# Altium PCB A13-OLinuXino-MICRO_Rev_B_saved.PcbDoc (part 1 of 4)
Units mil, origin at the board's own origin, x right, y up, seen from the top; angles counter-clockwise.
Board outline 3950 x 3350 mil, 4 copper layers (Top, Route2, Route15, Bottom), stack 64.567 mil thick; 262 components, 264 nets, 1099 pads, 476 vias.
Unrouted connection lines stored in the file: 19.
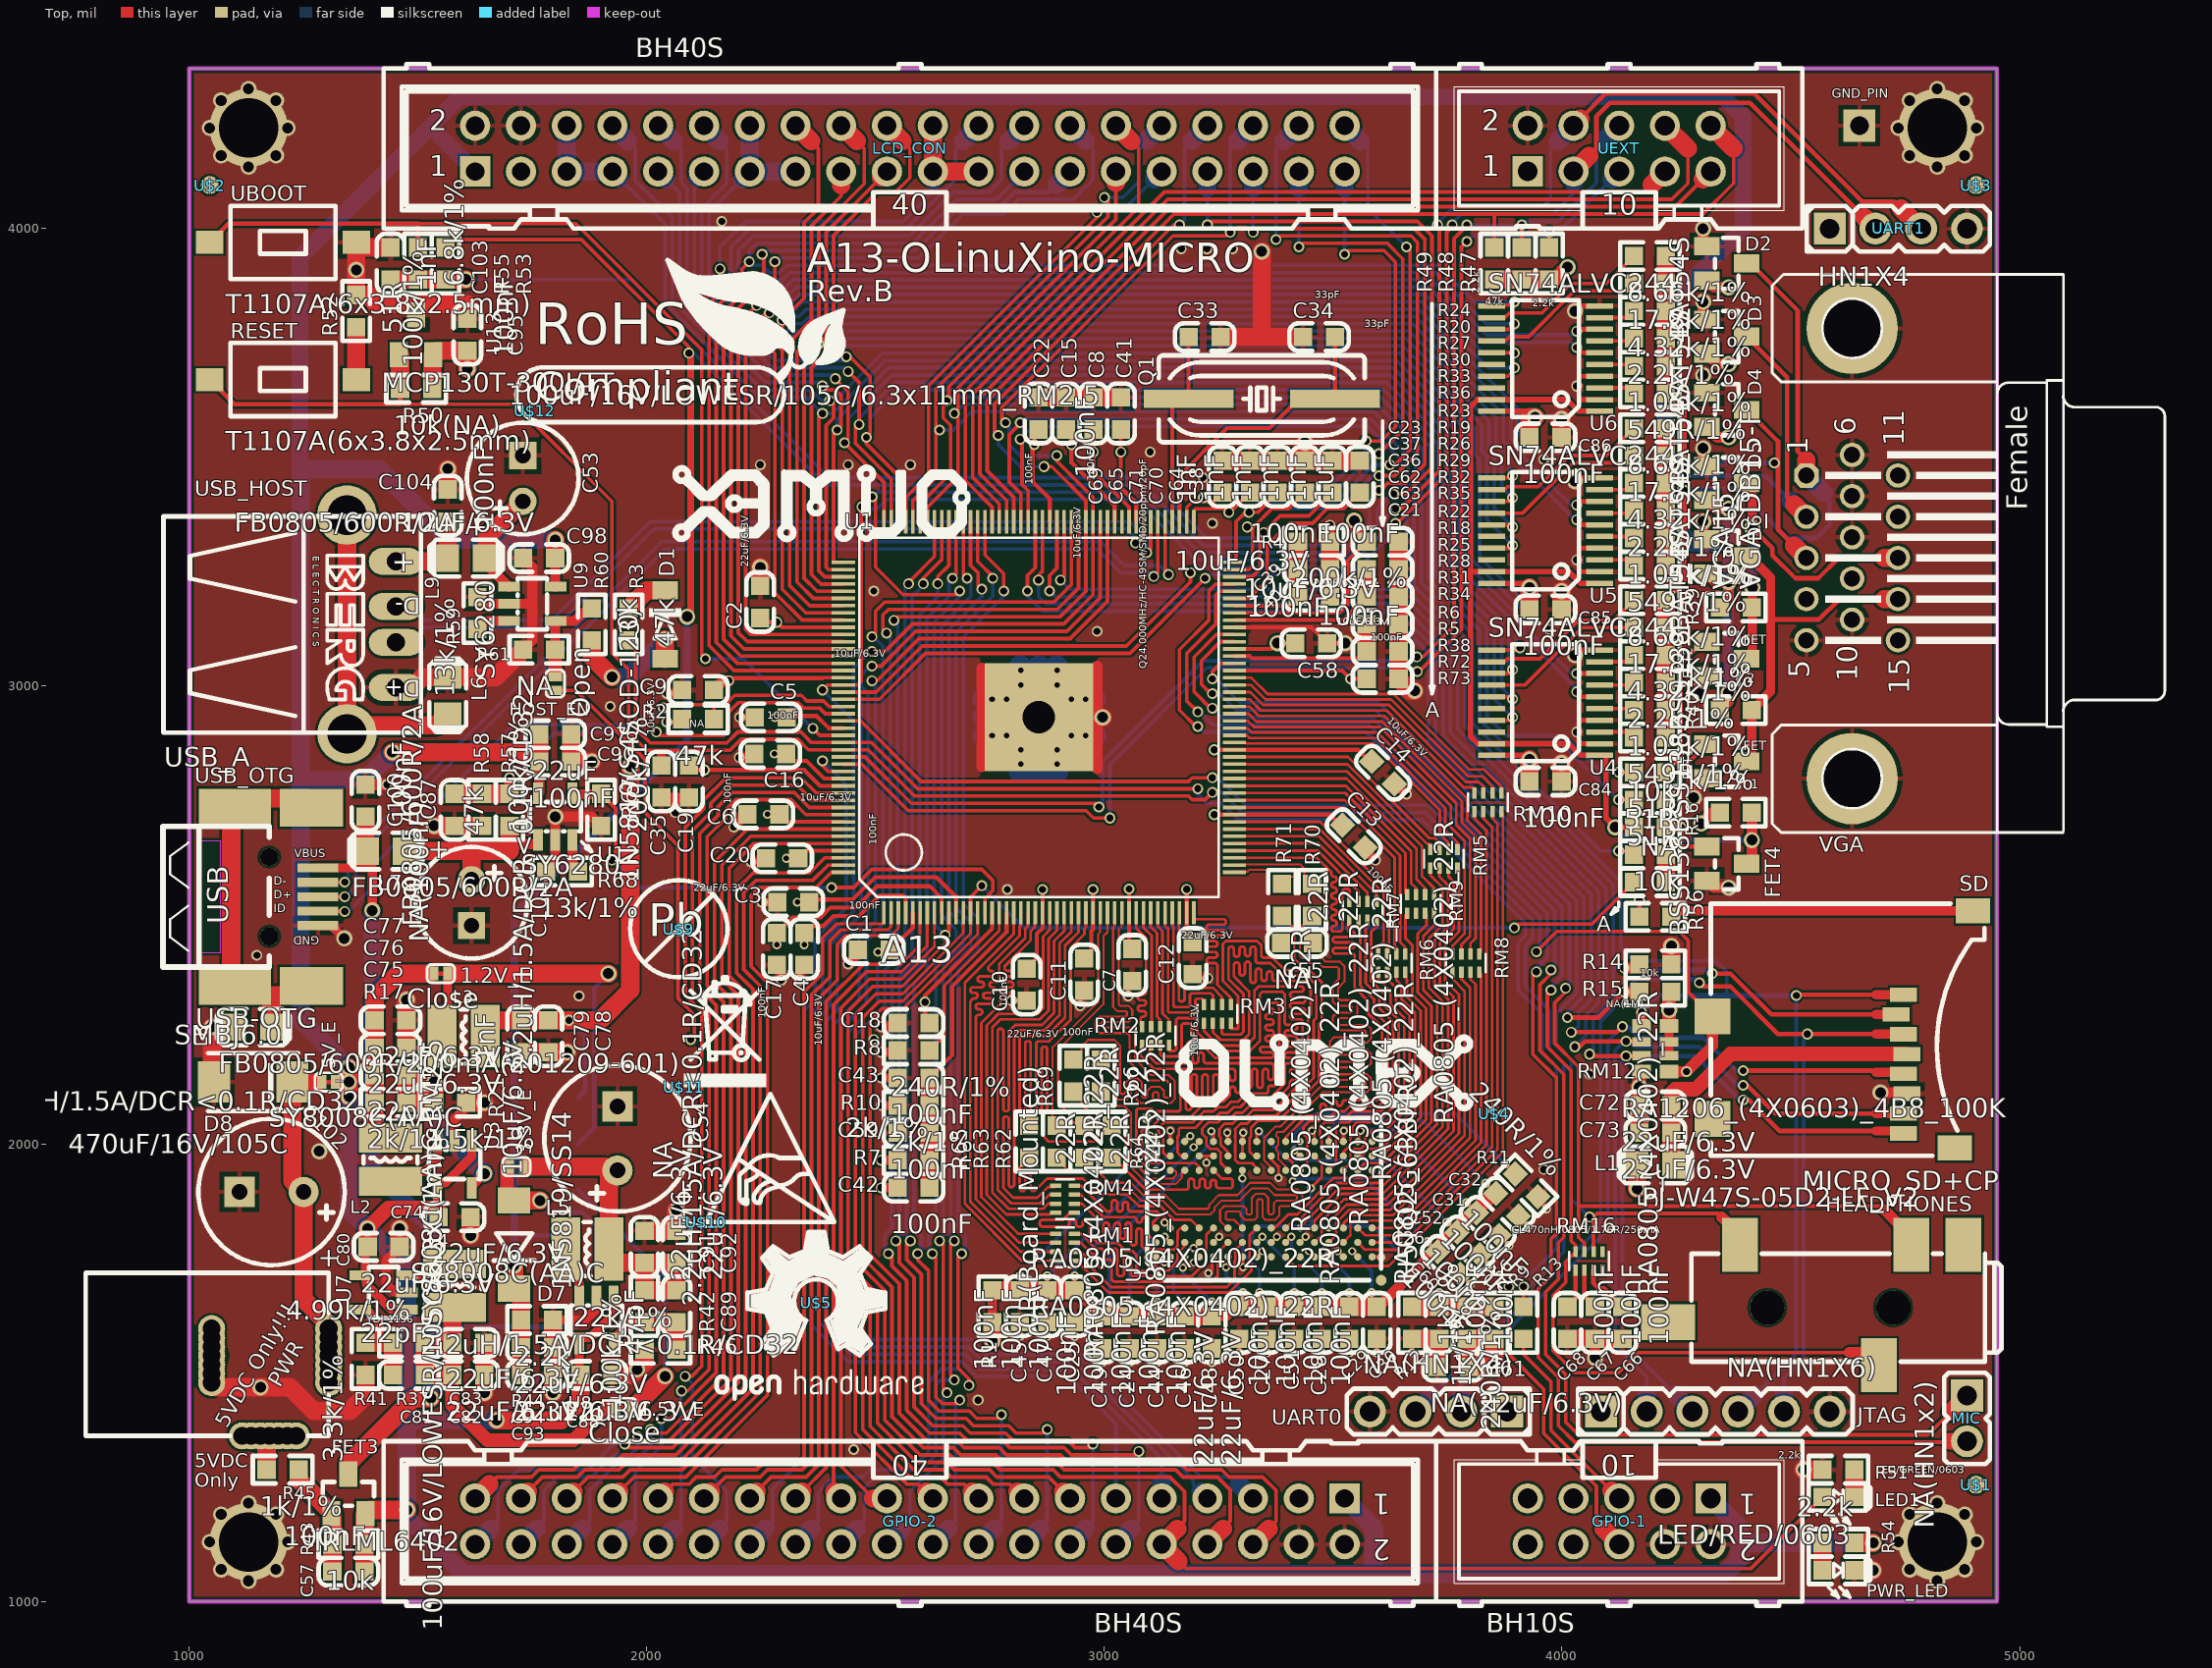
[diagram p0: Top view]
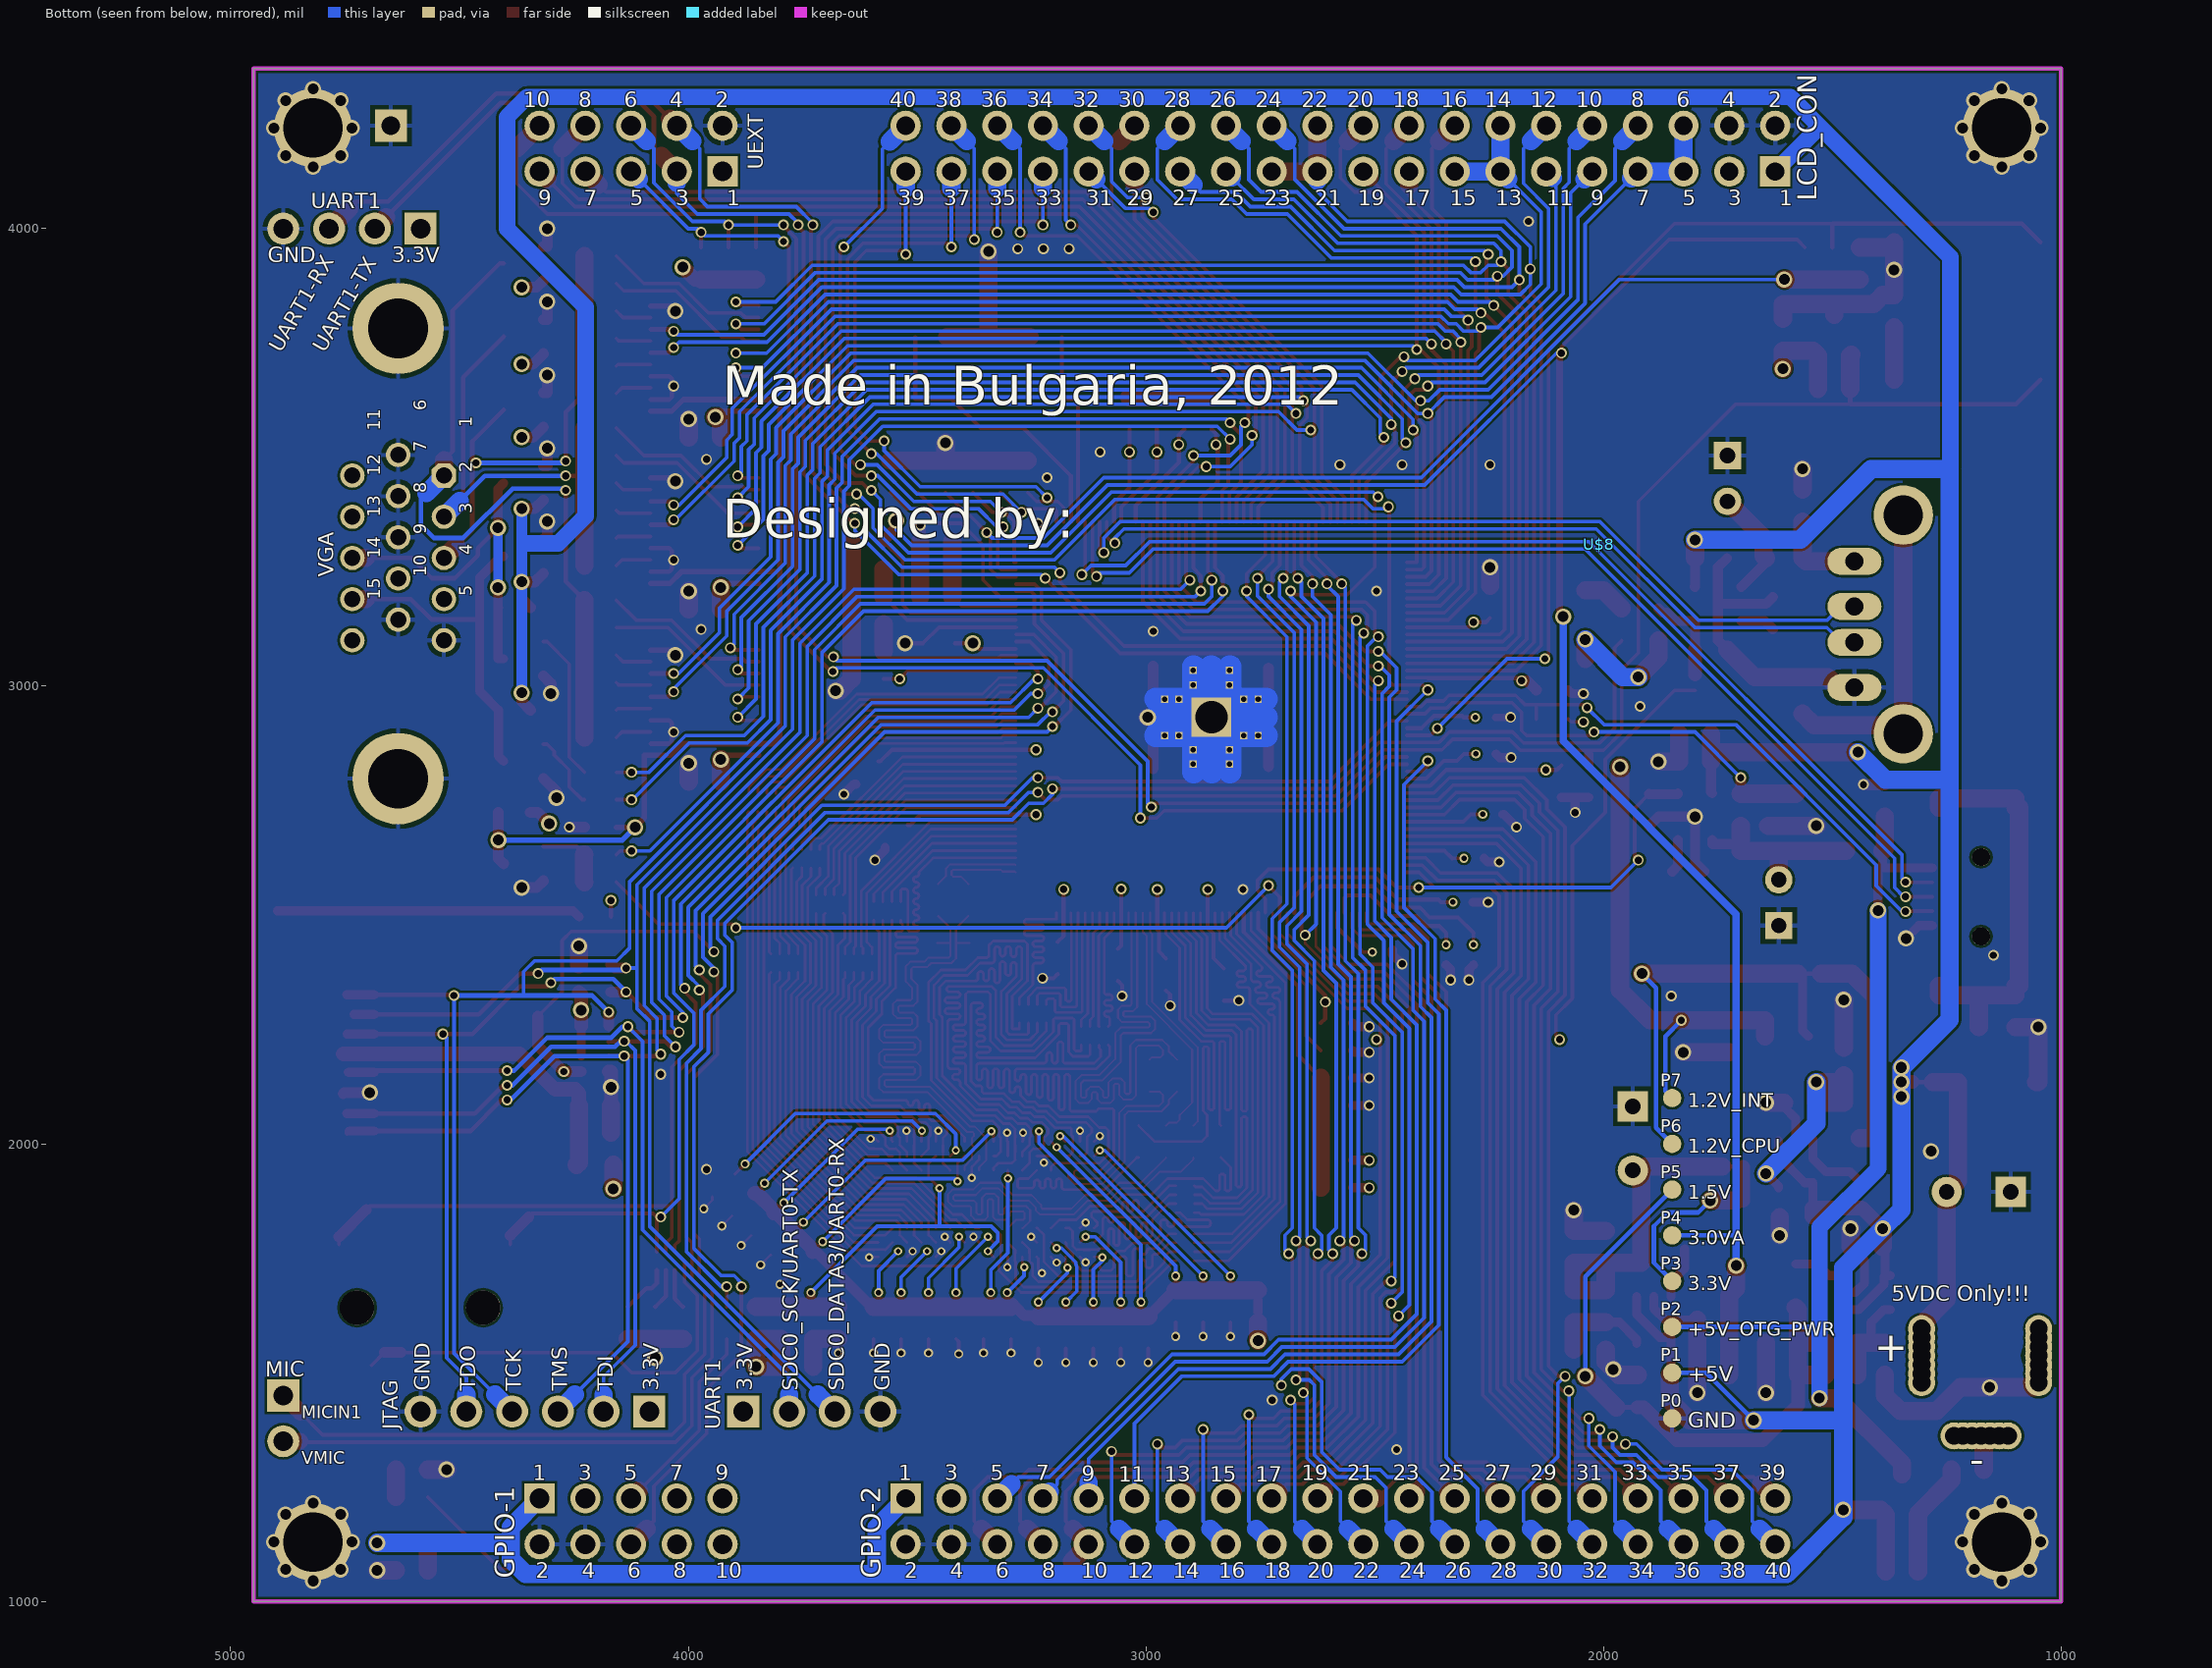
[diagram p1: Bottom view, seen from below]
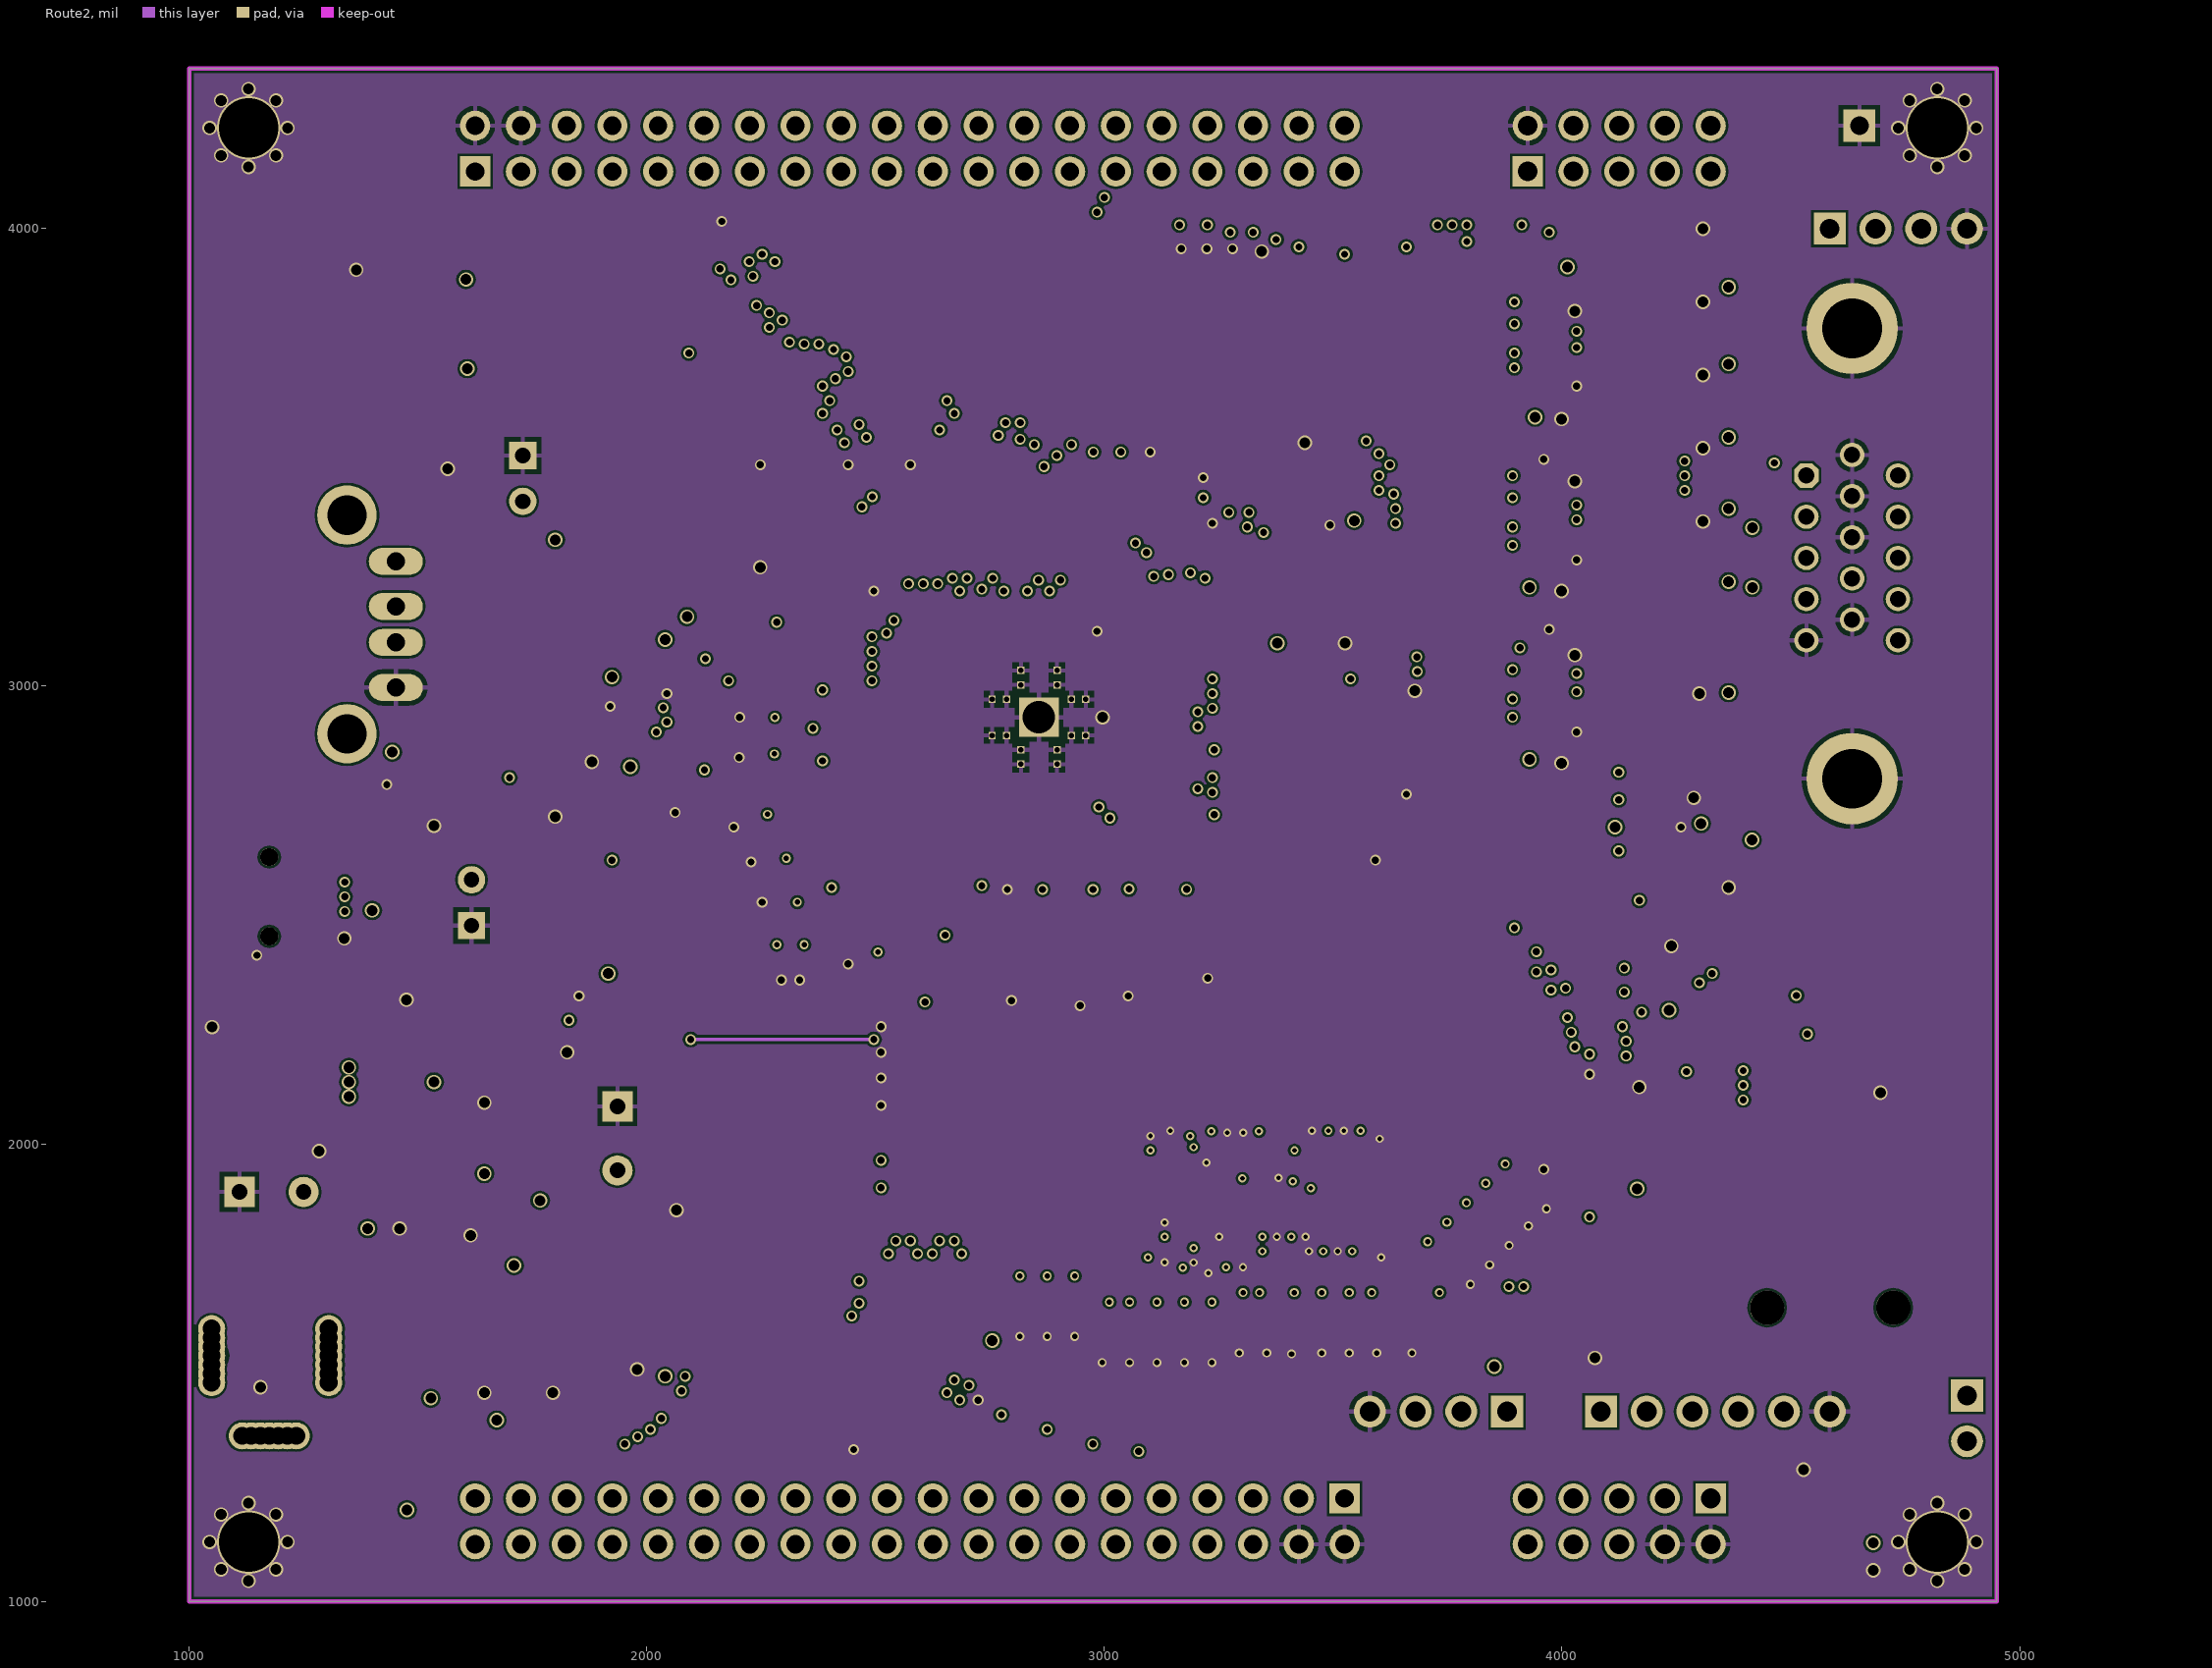
[diagram p2: Route2]
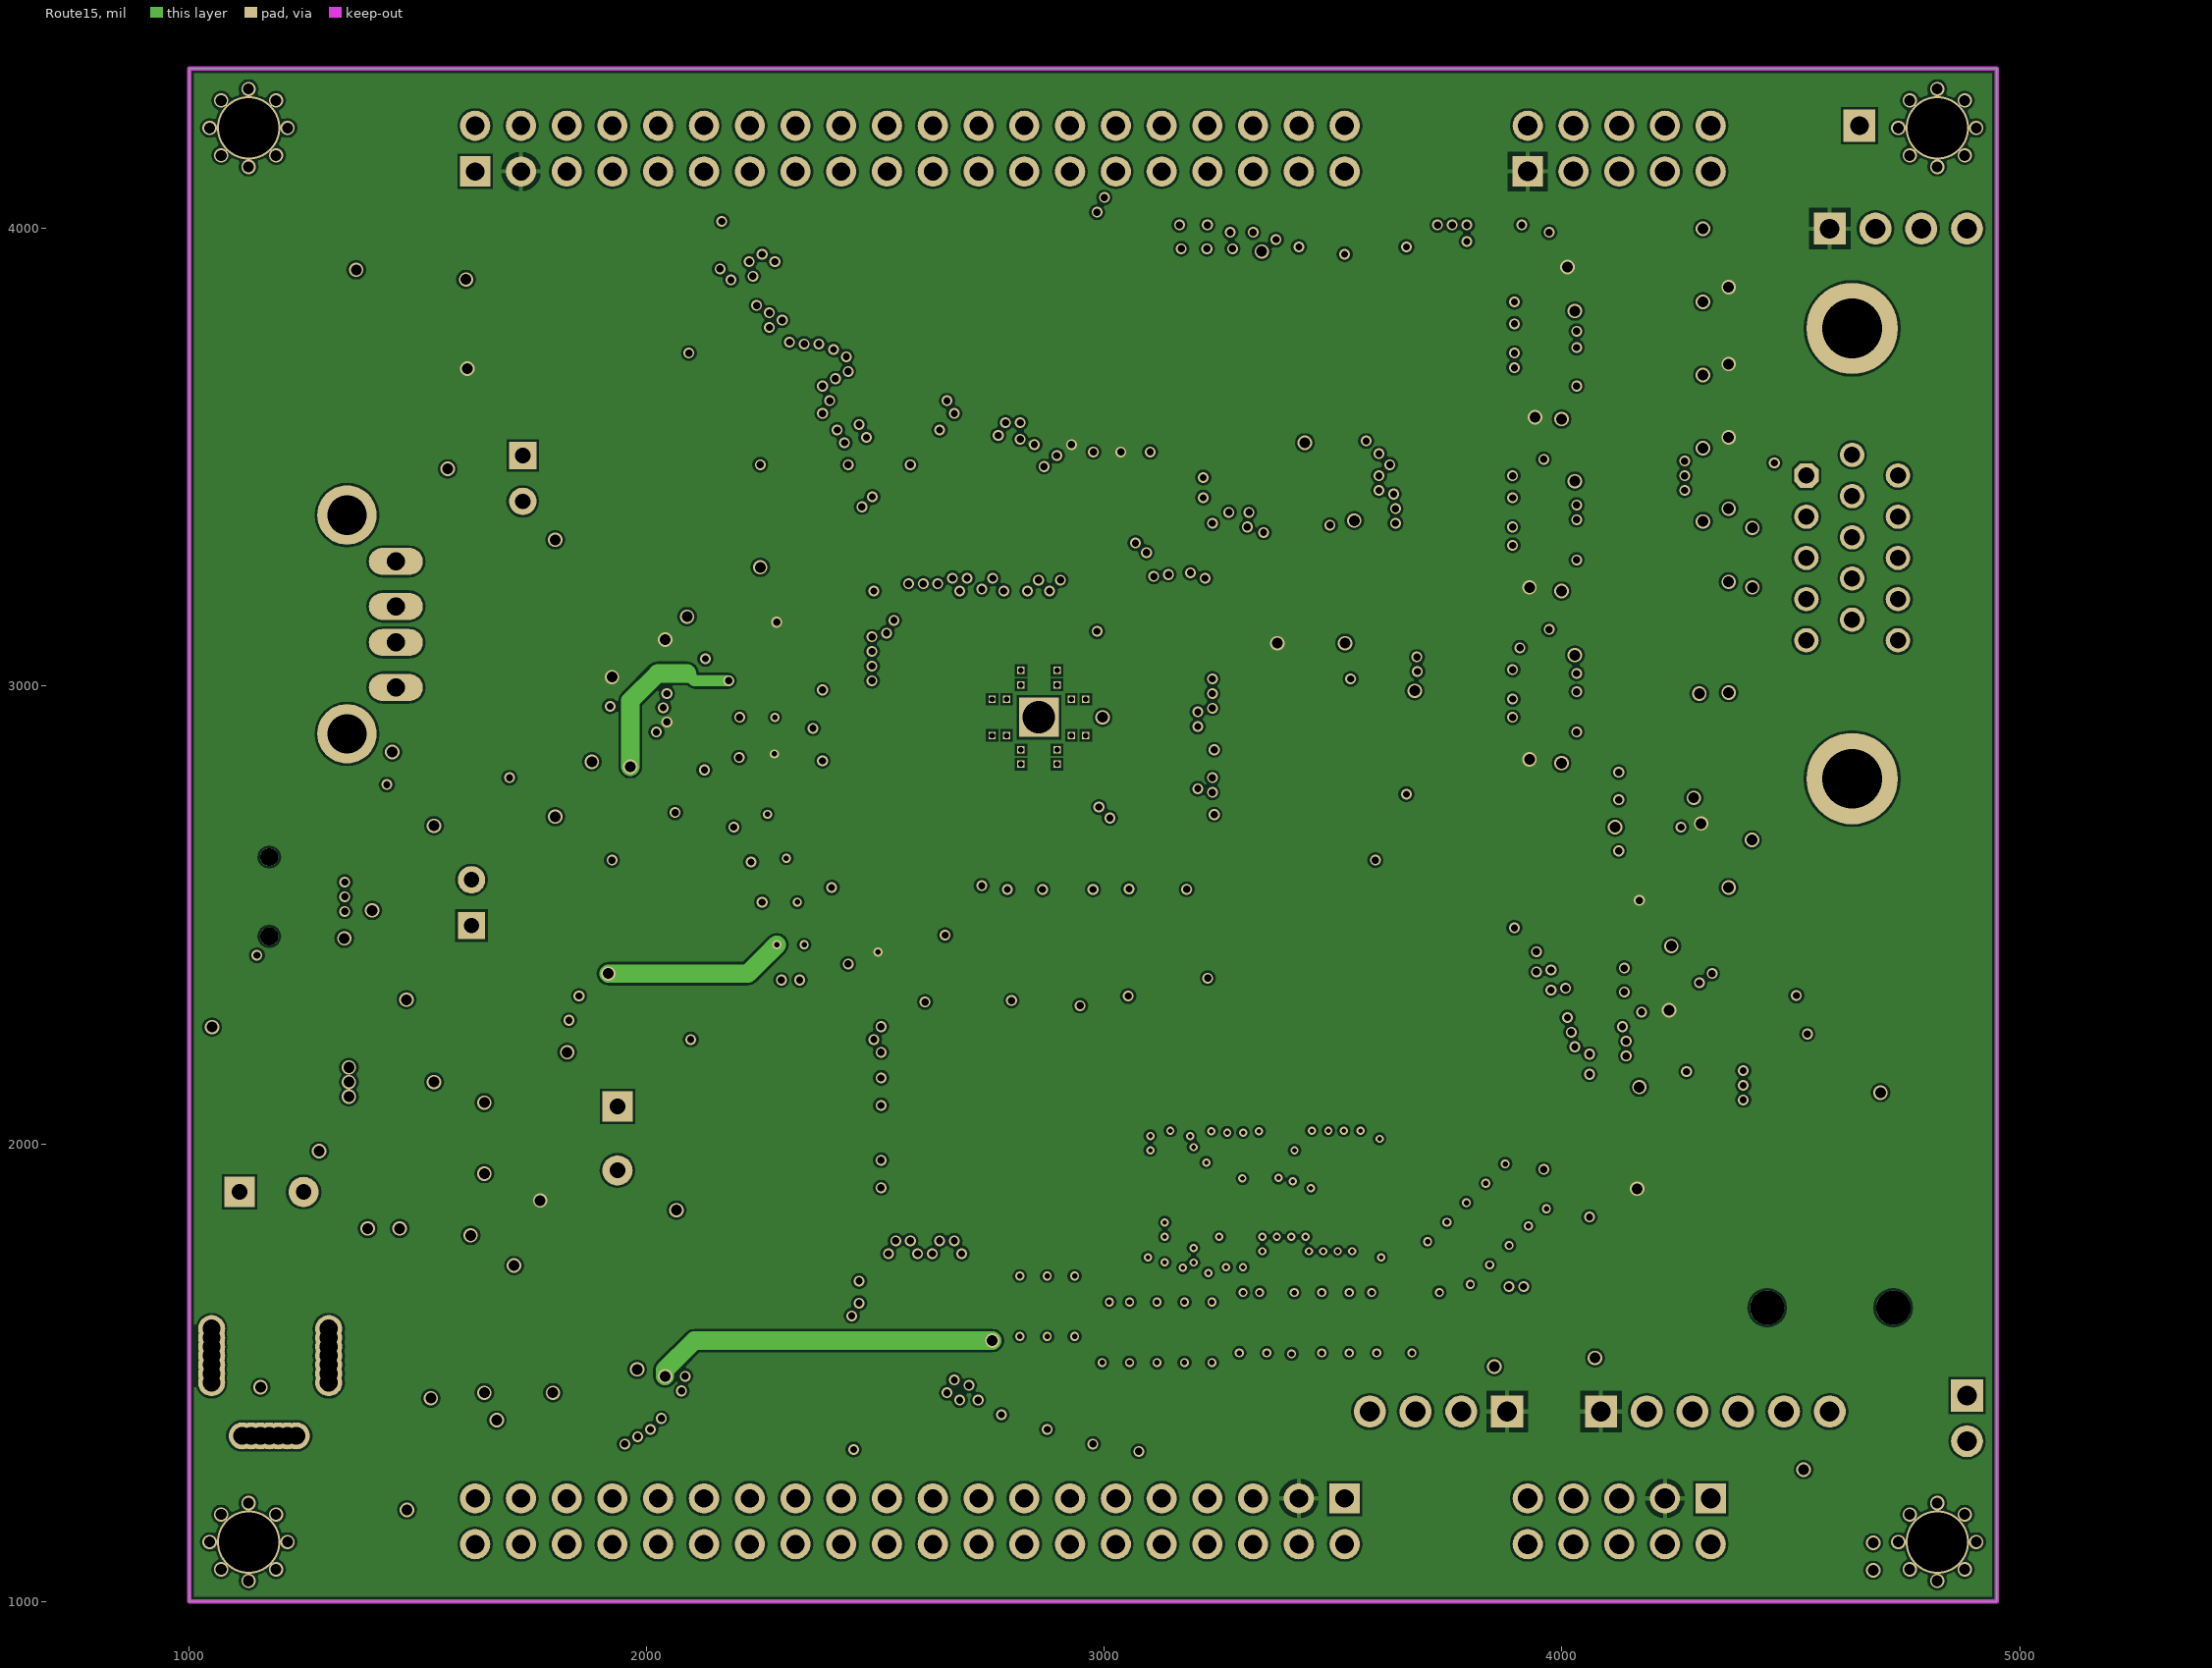
[diagram p3: Route15]

## Layer stack, top to bottom
Top Solder: solder mask 0.4, Solder Resist, Dk 3.5
Top: signal copper 1.378
Dielectric 1: core 19.685, FR-4, Dk 4.8
Route2: signal copper 1.378
Dielectric 2: core 19.685, FR-4, Dk 4.8
Route15: signal copper 1.378
Dielectric 3: core 19.685, FR-4, Dk 4.8
Bottom: signal copper 1.378
Bottom Solder: solder mask 0.4, Solder Resist, Dk 3.5

## Board outline
1000,4350 1000,1000 4950,1000 4950,4350

## Design rules (kind name [scope] priority, off if disabled: settings)
Clearance Clearance_1 [WithinRoom('vRestrict1') vs IsVia or IsThruPin] p1: gap=10
Clearance [All] p2: gap=5.2 except(0: SMDPad-SMDPad SMDPad-THPad SMDPad-Via)
Clearance "Clearance (Same Net)" [All] p3: gap=0 except(1: SMDPad-SMDPad SMDPad-THPad SMDPad-Via)
HoleSize HoleSize_1 [All] p1: absolutevalues=TRUE maxlimit=100000 minlimit=10 maxpercent=80.000 minpercent=20.000
HoleSize [All] p2: absolutevalues=TRUE maxlimit=100 minlimit=1 maxpercent=80.000 minpercent=20.000
HoleToHoleClearance mdViaViaSameLayer [All] p1: gap=8 allowstackedmicrovias=TRUE
HoleToHoleClearance [All] p2: gap=10 allowstackedmicrovias=TRUE
PasteMaskExpansion mlMinCreamFrame [All] p1: expansion=0
PasteMaskExpansion [All] p2: expansion=0
PolygonConnect ThermalVias [IsVia] p1: connectstyle=Direct reliefconductorwidth=10 reliefentries=4 polygonreliefangle="90 Angle" airgapwidth=10
PolygonConnect [All] p2: connectstyle=Relief reliefconductorwidth=10 reliefentries=4 polygonreliefangle="90 Angle" airgapwidth=10
RoomDefinition vRestrict1 [IsVia or IsThruPin vs False] p1: confinementstyle=ConfineOut formatcopy=TRUE lockcomponents=FALSE outline 1760,1715 1760,1845 1660,1845 1660,1715
RoutingVias [All] p1: holewidth=28 width=50 viastyle="Through Hole" minholewidth=28 minwidth=50 maxholewidth=28 maxwidth=50
SilkToSilkClearance [All] p1 off: silktosilkclearance=10
SilkToSolderMaskClearance [IsPad] p1 off: minsilkscreentomaskgap=10 clearancetoexposedcopper=TRUE
SolderMaskExpansion mlMinStopFrame [All] p1: expansion=2
SolderMaskExpansion [All] p2: expansion=4
Width Width_1 [All] p1: maxlimit=100000 minlimit=4.5 preferedwidth=10
Width [All] p2: maxlimit=10 minlimit=10 preferedwidth=10
25 further rules are at their usual default settings.

## Components (designator, comment, footprint, x,y, rotation, side; value= is the part's Value field where it differs from the comment)
1.2V_E "Close" SJ_1_SMALLER_CLOSE 1550,2372 r0 top
1.5V_E "Close" SJ_1_SMALLER_CLOSE 1947,1424 r0 top
3.3V_E "Close" SJ_1_SMALLER_CLOSE 1715,1950 r180 top
5V_E "Close" SJ_1_SMALLER_CLOSE 1305,2135 r0 top
C1 "100nF" C0603_DWS 2496,2424 r0 top
C2 "22uF/6.3V" C0603_DWS 2248,3184 r270 top
C3 "22uF/6.3V" C0603_DWS 2320,2528 r0 top
C4 "10uF/6.3V" C0603_DWS 2344,2426 r90 top
C5 "10uF/6.3V" C0603_DWS 2271,2932 r0 top
C6 "10uF/6.3V" C0603_DWS 2255,2720 r0 top
C7 "22uF/6.3V" C0603_DWS 3061,2391 r90 top
C8 "10uF/6.3V" C0603_DWS 2976,3596 r270 top
C9 "10uF/6.3V" C0603_DWS 2112,2992 r0 top
C10 "22uF/6.3V" C0603_DWS 2830,2348 r90 top
C11 "100nF" C0603_DWS 2956,2370 r90 top
C12 "10uF/6.3V" C0603_DWS 3193,2406 r90 top
C13 "100nF" C0603_DWS 3545,2672 r135 top
C14 "10uF/6.3V" C0603_DWS 3609,2811 r135 top
C15 "100nF" C0603_DWS 2916,3596 r270 top
C16 "100nF" C0603_DWS 2270,2852 r0 top
C17 "100nF" C0603_DWS 2284,2426 r90 top
C18 "100nF" C0603_DWS 2583,2264 r0 top
C19 "100nF" C0603_DWS 2092,2792 r90 top
C20 "100nF" C0603_DWS 2296,2624 r0 top
C21 "100nF" C0603_DWS 3608,3016 r180 top
C22 "100nF" C0603_DWS 2856,3596 r270 top
C23 "22uF/6.3V" C0603_DWS 3608,3316 r180 top
C24 "100nF" C0603_DWS 3055,1588 r270 top
C25 "100nF" C0603_DWS 2935,1645 r270 top
C26 "100nF" C0603_DWS 3752.87,1739.69 r315 top
C27 "22uF/6.3V" C0603_DWS 3355,1609 r270 top
C28 "100nF" C0603_DWS 3475,1609 r270 top
C29 "100nF" C0603_DWS 3535,1609 r270 top
C30 "100nF" C0603_DWS 3595,1609 r270 top
C31 "100nF" C0603_DWS 3837.72,1824.55 r315 top
C32 "100nF" C0603_DWS 3880.15,1866.97 r315 top
C33 "33pF" C0603_DWS 3219,3763 r180 top
C34 "33pF" C0603_DWS 3469,3763 r0 top
C35 "NA" C0603_DWS 2032,2792 r90 top
C36 "10uF/6.3V" C0603_DWS 3608,3196 r180 top
C37 "100nF" C0603_DWS 3608,3256 r180 top
C38 "1uF" C0603_DWS 3558,3458 r270 top
C39 "100nF" C0603_DWS 3458,3256 r180 top
C40 "10uF/6.3V" C0603_DWS 3458,3196 r180 top
C41 "100nF" C0603_DWS 3036,3596 r270 top
C42 "100nF" C0603_DWS 2583,1904 r0 top
C43 "100nF" C0603_DWS 2583,2144 r0 top
C44 "100nF" C0603_DWS 3115,1588 r270 top
C45 "100nF" C0603_DWS 2815,1645 r270 top
C46 "100nF" C0603_DWS 3175,1588 r270 top
C47 "100nF" C0603_DWS 2875,1645 r270 top
C48 "100nF" C0603_DWS 3235,1588 r270 top
C49 "100nF" C0603_DWS 2995,1588 r270 top
C50 "22uF/6.3V" C0603_DWS 3295,1609 r270 top
C51 "100nF" C0603_DWS 3415,1609 r270 top
C52 "100nF" C0603_DWS 3795.3,1782.12 r315 top
C53 "100uF/16V/LOWESR/105C/6.3x11mm_RM2.5" E2,5-6,3 1729,3454 r90 top
C54 "NA" E3,5-8 1936,2012 r90 top
C55 "NA" C0603_DWS 3421,2439 r0 top
C56 "100nF" C0603_DWS 3792,1609 r90 top
C57 "100nF" C0603_DWS 1348,1065 r180 top
C58 "100nF" C0603_DWS 3452,3094 r180 top
C59 "100nF" C0603_DWS 2583,2024 r0 top
C60 "100nF" C0603_DWS 3732,1609 r90 top
C61 "NA(22uF/6.3V)" C0603_DWS 3762,1513 r0 top
C62 "10uF/6.3V" C0603_DWS 3608,3136 r180 top
C63 "100nF" C0603_DWS 3608,3076 r180 top
C64 "1nF" C0603_DWS 3498,3458 r270 top
C65 "1nF" C0603_DWS 3318,3458 r270 top
C66 "100nF" C0603_DWS 4132,1609 r90 top
C67 "100nF" C0603_DWS 4072,1609 r90 top
C68 "100nF" C0603_DWS 4012,1609 r90 top
C69 "1nF" C0603_DWS 3258,3458 r270 top
C70 "1nF" C0603_DWS 3438,3458 r270 top
C71 "1nF" C0603_DWS 3378,3458 r270 top
C72 "22uF/6.3V" C0603_DWS 4204,2084 r0 top
C73 "22uF/6.3V" C0603_DWS 4204,2024 r0 top
C74 "22uF/6.3V" C0603_DWS 1580,1840 r0 top
C75 "22pF" C0603_DWS 1440,2150 r0 top
C76 "22uF/6.3V" C0603_DWS 1440,2210 r0 top
C77 "22uF/6.3V" C0603_DWS 1440,2270 r0 top
C78 "10uF/6.3V" C0603_DWS 1785,2235 r270 top
C79 "1nF" C0603_DWS 1725,2235 r270 top
C80 "22uF/6.3V" C0603_DWS 1425,1775 r0 top
C81 "22pF" C0603_DWS 1480,1495 r180 top
C82 "22uF/6.3V" C0603_DWS 1610,1495 r0 top
C83 "22uF/6.3V" C0603_DWS 1610,1565 r0 top
C84 "100nF" C0603_DWS 3964,2792 r0 top
C85 "100nF" C0603_DWS 3964,3168 r0 top
C86 "100nF" C0603_DWS 3964,3544 r0 top
C87 "NA(100nF)" C0603_DWS 1580,2730 r270 top
C88 "22uF/6.3V" C0603_DWS 1890,1495 r0 top
C89 "47pF" C0603_DWS 2065,1645 r270 top
C90 "100nF" C0603_DWS 1800,2835 r0 top
C91 "22uF/6.3V" C0603_DWS 1995,1775 r90 top
C92 "22uF/6.3V" C0603_DWS 2065,1775 r90 top
C93 "22uF/6.3V" C0603_DWS 1760,1495 r0 top
C94 "22uF/6.3V" C0603_DWS 1760,1555 r0 top
C95 "100nF" C0603_DWS 1608,3768 r90 top
C97 "22uF" C0603_DWS 1800,2895 r0 top
C98 "10uF/6.3V" C0603_DWS 1765,3280 r180 top
C100 "100nF" C0603_DWS 1385,2750 r90 top
C101 "100uF/16V/LOWESR/105C/6.3x11mm_RM2.5" E2,5-6,3 1617,2527 r270 top
C102 "470uF/16V/105C" E3,5-8 1180,1895 r180 top
C103 "1nF" C0603_DWS 1440,3924 r90 top
C104 "100nF" C0603_DWS 1565,3395 r90 top
D1 "1N5819(S4SOD-123)" SOD-123 2040,3135 r270 top
D2 "BAT54S" SOT23C(BAT54S) 4360,3924 r270 top
D3 "BAT54S" SOT23C(BAT54S) 4360,3764 r270 top
D4 "BAT54S" SOT23C(BAT54S) 4360,3604 r270 top
D5 "BAT54S" SOT23C(BAT54S) 4360,3444 r270 top
D6 "BAT54S" SOT23C(BAT54S) 4360,3284 r270 top
D7 "1N5819/SS14" MLL-41 1710,1780 r90 top
D8 "SMBJ6.0" DO214AA 1140,2135 r180 top
FET1 "BSS138" SOT23 4360,2836 r270 top
FET2 "BSS138" SOT23 4360,3060 r270 top
FET3 "IRLML6402" SOT23 1348,1235 r0 top
FET4 "BSS138" SOT23 4360,2612 r270 top
GND_PIN "" TEST_PAD40/70/SQUARE 4650,4225 r0 top
GPIO-1 "BH10S" ML10-MALE 4125,1175 r180 top
GPIO-2 "BH40S" ML40 2575,1175 r180 top
HEADPHONES "PJ-W47S-05D2-LF_V2" PJ-W47S-05D2-LF_5PIN_V2 4960,1760 r180 top
HOST_EN "Open" SJ_1_SMALLER 1800,3006 r90 top
JTAG "NA(HN1X6)" HN1X6 4335,1415 r0 top
L1 "CL470nH/0805/1.76R/250mA" L0805_5MIL_DWS 4204,1954 r0 top
L2 "2.2uH/1.5A/DCR<0.1R/CD32" CD32 1440,1965 r180 top
L3 "2.2uH/1.5A/DCR<0.1R/CD32" CD32 1600,2235 r90 top
L4 "2.2uH/1.5A/DCR<0.1R/CD32" CD32 1580,1690 r0 top
L5 "2.2uH/1.5A/DCR<0.1R/CD32" CD32 1870,1770 r90 top
L6 "FB0805/600R/2A" L0805_5MIL_DWS 1565,2980 r270 top
L7 "FB0805/600R/2A" L0805_5MIL_DWS 1430,2640 r0 top
L8 "FB0805/600R/200mA(201209-601)" L0805_5MIL_DWS 1140,2255 r0 top
L9 "FB0805/600R/2A" L0805_5MIL_DWS 1605,3280 r180 top
LCD_CON "BH40S" ML40 2575,4175 r0 top
LED1 "LED/GREEN/0603" LED-0603 4604,1228 r180 top
MIC "NA(HN1x2)" JP1 4885,1400 r180 top
P0 "" TESTPAD_40-ROUND 1850,1400 r180 bottom
P1 "" TESTPAD_40-ROUND 1850,1500 r180 bottom
P2 "" TESTPAD_40-ROUND 1850,1600 r180 bottom
P3 "" TESTPAD_40-ROUND 1850,1700 r180 bottom
P4 "" TESTPAD_40-ROUND 1850,1800 r180 bottom
P5 "" TESTPAD_40-ROUND 1850,1900 r180 bottom
P6 "" TESTPAD_40-ROUND 1850,2000 r180 bottom
P7 "" TESTPAD_40-ROUND 1850,2100 r180 bottom
PWR "YDJ-1136" PWR_JACK_UNI_MILLING 1305,1350 r0 top
PWR_LED "LED/RED/0603" LED-0603 4604,1068 r180 top
Q1 "Q24.000MHz/HC-49SM/SMD/20ppm/20pF" HC49/SMD2_THIN 3344,3628 r180 top
R1 "0R(Board_Mounted)" 0603_0R 2755,1645 r90 top
R2 "47k" R0603_5MIL_DWS 2112,2928 r0 top
R3 "47k" R0603_5MIL_DWS 1960,3135 r90 top
R4 "200k/1%" R0603_5MIL_DWS 3458,3316 r0 top
R5 "51R" R0603_5MIL_DWS 4192,2752 r0 top
R6 "51R" R0603_5MIL_DWS 4192,2812 r0 top
R7 "2k/1%" R0603_5MIL_DWS 2583,1964 r180 top
R8 "240R/1%" R0603_5MIL_DWS 2583,2204 r0 top
R9 "1k/1%" R0603_5MIL_DWS 3852,1609 r270 top
R10 "2k/1%" R0603_5MIL_DWS 2583,2084 r0 top
R11 "240R/1%" R0603_5MIL_DWS 3922.58,1909.4 r135 top
R12 "1k/1%" R0603_5MIL_DWS 3672,1609 r90 top
R13 "240R/1%" R0603_5MIL_DWS 3916,1609 r270 top
R14 "NA(1M)" R0603_5MIL_DWS 4204,2392 r0 top
R15 "10k" R0603_5MIL_DWS 4204,2332 r0 top
R16 "1k/1%" R0603_5MIL_DWS 4380,2724 r180 top
R17 "2k/1%" R0603_5MIL_DWS 1440,2090 r0 top
R18 "17.8k/1%" R0603_5MIL_DWS 4192,3128 r0 top
R19 "17.8k/1%" R0603_5MIL_DWS 4192,3504 r0 top
R20 "17.8k/1%" R0603_5MIL_DWS 4192,3880 r0 top
R21 "1.5k/1%" R0603_5MIL_DWS 1570,2090 r0 top
R22 "8.66k/1%" R0603_5MIL_DWS 4192,3188 r0 top
R23 "8.66k/1%" R0603_5MIL_DWS 4192,3564 r0 top
R24 "8.66k/1%" R0603_5MIL_DWS 4192,3940 r0 top
R25 "4.32k/1%" R0603_5MIL_DWS 4192,3068 r0 top
R26 "4.32k/1%" R0603_5MIL_DWS 4192,3444 r0 top
R27 "4.32k/1%" R0603_5MIL_DWS 4192,3820 r0 top
R28 "2.2k/1%" R0603_5MIL_DWS 4192,3008 r0 top
R29 "2.2k/1%" R0603_5MIL_DWS 4192,3384 r0 top
R30 "2.2k/1%" R0603_5MIL_DWS 4192,3760 r0 top
R31 "1.05k/1%" R0603_5MIL_DWS 4192,2948 r0 top
R32 "1.05k/1%" R0603_5MIL_DWS 4192,3324 r0 top
R33 "1.05k/1%" R0603_5MIL_DWS 4192,3700 r0 top
R34 "549R/1%" R0603_5MIL_DWS 4192,2888 r0 top
R35 "549R/1%" R0603_5MIL_DWS 4192,3264 r0 top
R36 "549R/1%" R0603_5MIL_DWS 4192,3640 r0 top
R37 "4.99k/1%" R0603_5MIL_DWS 1480,1565 r180 top
R38 "10k" R0603_5MIL_DWS 4192,2692 r180 top
R39 "1k/1%" R0603_5MIL_DWS 4380,3172 r180 top
R40 "1k/1%" R0603_5MIL_DWS 4380,2948 r180 top
R41 "3.3k/1%" R0603_5MIL_DWS 1385,1530 r270 top
R42 "100k/1%" R0603_5MIL_DWS 1995,1645 r270 top
R43 "10k" R0603_5MIL_DWS 1348,1125 r0 top
R44 "2.2k" R0603_5MIL_DWS 1760,1615 r0 top
R45 "1k/1%" R0603_5MIL_DWS 1204.19,1287.94 r0 top
R46 "22k/1%" R0603_5MIL_DWS 2030,1550 r180 top
R47 "2.2k" R0603_5MIL_DWS 3972,3924 r270 top
R48 "2.2k" R0603_5MIL_DWS 3912,3924 r270 top
R49 "47k" R0603_5MIL_DWS 3852,3924 r270 top
R50 "10k(NA)" R0603_5MIL_DWS 1496,3650 r0 top
R51 "2.2k" R0603_5MIL_DWS 4604,1288 r0 top
R52 "51R" R0603_5MIL_DWS 1365,3820 r90 top
R53 "100k/1%" R0603_5MIL_DWS 1560,3924 r270 top
R54 "2.2k" R0603_5MIL_DWS 4604,1128 r180 top
R55 "6.8k/1%" R0603_5MIL_DWS 1500,3924 r90 top
R56 "10k" R0603_5MIL_DWS 4204,2496 r180 top
R57 "47k" R0603_5MIL_DWS 1700,2730 r270 top
R58 "100k/1%" R0603_5MIL_DWS 1640,2730 r90 top
R59 "13k/1%" R0603_5MIL_DWS 1630,3160 r270 top
R60 "10k" R0603_5MIL_DWS 1880,3135 r90 top
R61 "NA" R0603_5MIL_DWS 1765,3080 r0 top
R62 "22R" R0603_5MIL_DWS 2956,2005 r90 top
R63 "22R" R0603_5MIL_DWS 2896,2005 r90 top
R64 "22R" R0603_5MIL_DWS 3016,2005 r90 top
R65 "22R" R0603_5MIL_DWS 2836,2005 r90 top
R66 "22R" R0603_5MIL_DWS 2992,2149 r90 top
R67 "200k/1%" R0603_5MIL_DWS 1900,2730 r90 top
R68 "13k/1%" R0603_5MIL_DWS 1815,2595 r0 top
R69 "22R" R0603_5MIL_DWS 2932,2149 r90 top
R70 "22R" R0603_5MIL_DWS 3454,2533 r90 top
R71 "22R" R0603_5MIL_DWS 3388,2533 r90 top
R72 "51R" R0603_5MIL_DWS 4192,2632 r180 top
R73 "NA" R0603_5MIL_DWS 4192,2572 r180 top
RESET "T1107A(6x3.8x2.5mm)" SW-TAKT_6X3.5_SMD 1205,3670 r270 top
RM1 "RA0805_(4X0402)_22R" R_MATRIX_4_0402_25X625 2914,1774 r0 top
RM2 "RA0805_(4X0402)_22R" R_MATRIX_4_0402_25X625 3112,2236 r270 top
RM3 "RA0805_(4X0402)_22R" R_MATRIX_4_0402_25X625 3247,2284 r270 top
RM4 "RA0805_(4X0402)_22R" R_MATRIX_4_0402_25X625 2914,1879 r0 top
RM5 "RA0805_(4X0402)_22R" R_MATRIX_4_0402_25X625 3742,2623 r270 top
RM6 "RA0805_(4X0402)_22R" R_MATRIX_4_0402_25X625 3628,2395 r270 top
RM7 "RA0805_(4X0402)_22R" R_MATRIX_4_0402_25X625 3565,2509 r270 top
RM8 "RA0805_(4X0402)_22R" R_MATRIX_4_0402_25X625 3790,2395 r270 top
RM9 "RA0805_(4X0402)_22R" R_MATRIX_4_0402_25X625 3691,2524 r270 top
RM10 "RA0805_(4X0402)_22R" R_MATRIX_4_0402_25X625 3838,2746 r270 top
RM12 "RA1206_(4X0603)_4B8_100K" R_MATRIX_4 4204,2208 r0 top
RM16 "RA0805_(4X0402)_22R" R_MATRIX_4_0402_25X625 4059,1744 r90 top
SD "MICRO_SD+CP" TFR-MEM-CON 4325,2200 r270 top
U1 "A13" TQFP176 2857,2932 r0 top
U2 "H5TQ2G63BFR" FBGA96 3348.83,1879.02 r90 top
U3 "SY8008C(AA)C" SOT23-5 1580,1955 r180 top
U4 "SN74ALVC244" PW 3964,2964 r90 top
U5 "SN74ALVC244" PW 3964,3340 r90 top
U6 "SN74ALVC244" PW 3964,3716 r90 top
U7 "SY8008C(AA)C" SOT23-5 1425,1675 r90 top
U8 "SY8008C(AA)C" SOT23-5 1890,1615 r180 top
U9 "SY6280" SOT23-5 1750,3180 r270 top
U12 "SY6280" SOT23-5 1800,2715 r0 top
U13 "MCP130T-300I/TT" SOT23 1496,3768 r0 top
U$1 "" FIDUCIAL-1X2 4905,1255 r180 top
U$2 "" FIDUCIAL-1X2 1045,4095 r180 top
U$3 "" FIDUCIAL-1X2 4905,4095 r180 top
U$4 "" OLIMEX1_V 3851.94,2065.98 r0 top
U$5 "" LOGO-OPENHARDWARE_8X8 2370,1653 r0 top
U$8 "" OLIMEX1_V 2010,3310 r180 bottom
U$9 "" PB 2070,2470 r0 top
U$10 "" ESD_SYMBOL 2130,1829 r0 top
U$11 "" RECYCLE_BIN1/8 2081,2124 r0 top
U$12 "" ROHS 1755,3602 r0 top
UART0 "NA(HN1X4)" HN1X4 3730,1415 r180 top
UART1 "HN1X4" HN1X4 4735,4000 r0 top
UBOOT "T1107A(6x3.8x2.5mm)" SW-TAKT_6X3.5_SMD 1205,3970 r270 top
UEXT "BH10S" ML10-MALE 4125,4175 r0 top
USB_HOST "USB_A" USB_PN87520_HOST_PTH 1345,3135 r270 top
USB_OTG "USB-OTG" USB_MINI_9PIN 1175,2540 r0 top
VGA_DB15-F "VGA15" DB15-F_22MM 4784,3290 r90 top

## Footprints (in the part's own frame and the unit in brackets; to place one, negate y for a bottom-side part, rotate by r counter-clockwise, add the part's x,y. Pads: shape width x height; smd on the part's side, far side on the other; paste and mask are expansions set on the pad)
0603_0R [mil] "0603_0R"
  rect 40x40 smd: 1(-35,0) 2(35,0)
  Top region: -16,-10 16,-10 16,10 -16,10
  silkscreen extent -65,-30 65,30
C0603_DWS [mil] "C0603_DWS"
  rect 40x40 smd: 1(-35,0) 2(35,0)
  silkscreen extent -65,-30 65,30
CD32 [mil] "CD32"
  rect 137.8x62.99 smd: 1(0,47.24) 2(0,-47.24)
  silkscreen extent -59,-8 59,8
DB15-F_22MM [mil] "DB15-F_22MM"
  oct 53.15x53.15 hole 35.43: 1(170.43,250)
  round 53.15 hole 35.43: 2(80.43,250) 3(-9.57,250) 4(-99.57,250) 5(-189.57,250) 6(215.43,150) 7(125.43,150) 8(35.43,150) 9(-54.57,150) 10(-144.57,150) 11(170.43,50) 12(80.43,50) 13(-9.57,50) 14(-99.57,50) 15(-189.57,50)
  round 200 hole 130: GND1(-492,150) GND2(492,150)
  silkscreen extent -610,-533 610,325
DO214AA [mil] "DO214AA"
  rect 70x90 smd: A(85.71,0) C(-85.71,0)
  silkscreen extent -98,-63 98,63
E2,5-6,3 [mil] "E2,5-6,3"
  round 60 hole 34: +(-50,0)
  rect 60x60 hole 34: -(50,0)
  silkscreen extent -122,-122 122,122
E3,5-8 [mil] "E3,5-8"
  round 66 hole 34: +(-70,0)
  rect 66x66 hole 34: -(70,0)
  silkscreen extent -160,-160 160,160
ESD_SYMBOL [mil] "ESD_SYMBOL"
  silkscreen extent 0,0 280,280
FBGA96 [mm] "FBGA96"
  rrect100% 0.4x0.4 smd: A1(-3.2,6) A2(-2.4,6) A3(-1.6,6) A7(1.6,6) A8(2.4,6) A9(3.2,6) B1(-3.2,5.2) B2(-2.4,5.2) B3(-1.6,5.2) B7(1.6,5.2) B8(2.4,5.2) B9(3.2,5.2) C1(-3.2,4.4) C2(-2.4,4.4) C3(-1.6,4.4) C7(1.6,4.4) C8(2.4,4.4) C9(3.2,4.4) D1(-3.2,3.6) D2(-2.4,3.6) D3(-1.6,3.6) D7(1.6,3.6) D8(2.4,3.6) D9(3.2,3.6) E1(-3.2,2.8) E2(-2.4,2.8) E3(-1.6,2.8) E7(1.6,2.8) E8(2.4,2.8) E9(3.2,2.8) F1(-3.2,2) F2(-2.4,2) F3(-1.6,2) F7(1.6,2) F8(2.4,2) F9(3.2,2) G1(-3.2,1.2) G2(-2.4,1.2) G3(-1.6,1.2) G7(1.6,1.2) G8(2.4,1.2) G9(3.2,1.2) H1(-3.2,0.4) H2(-2.4,0.4) H3(-1.6,0.4) H7(1.6,0.4) H8(2.4,0.4) H9(3.2,0.4) J1(-3.2,-0.4) J2(-2.4,-0.4) J3(-1.6,-0.4) J7(1.6,-0.4) J8(2.4,-0.4) J9(3.2,-0.4) K1(-3.2,-1.2) K2(-2.4,-1.2) K3(-1.6,-1.2) K7(1.6,-1.2) K8(2.4,-1.2) K9(3.2,-1.2) L1(-3.2,-2) L2(-2.4,-2) L3(-1.6,-2) L7(1.6,-2) L8(2.4,-2) L9(3.2,-2) M1(-3.2,-2.8) M2(-2.4,-2.8) M3(-1.6,-2.8) M7(1.6,-2.8) M8(2.4,-2.8) M9(3.2,-2.8) N1(-3.2,-3.6) N2(-2.4,-3.6) N3(-1.6,-3.6) N7(1.6,-3.6) N8(2.4,-3.6) N9(3.2,-3.6) P1(-3.2,-4.4) P2(-2.4,-4.4) P3(-1.6,-4.4) P7(1.6,-4.4) P8(2.4,-4.4) P9(3.2,-4.4) R1(-3.2,-5.2) R2(-2.4,-5.2) R3(-1.6,-5.2) R7(1.6,-5.2) R8(2.4,-5.2) R9(3.2,-5.2) T1(-3.2,-6) T2(-2.4,-6) T3(-1.6,-6) T7(1.6,-6) T8(2.4,-6) T9(3.2,-6)
  rrect100% 0.6x0.6 smd: FID1(-4.5,-6.5) FID2(4.5,6.5)
  silkscreen extent -4.5,-6.5 4.5,6.5
FIDUCIAL-1X2 [mm] "FIDUCIAL-1X2"
  rrect100% 1x1 smd: 1(0,0)
HC49/SMD2_THIN [mm] "HC49/SMD2_THIN"
  rect 5x1 smd: 1(-4.064,0) 2(4.064,0)
  silkscreen extent -5.71,-2.41 5.71,2.41
HN1X4 [mil] "HN1X4"
  rect 70x70 hole 43.31: 1(-150,0)
  round 70 hole 43.31: 2(-50,0) 3(50,0) 4(150,0)
  silkscreen extent -200,-50 200,50
HN1X6 [mil] "HN1X6"
  rect 70x70 hole 43.31: 1(-250,0)
  round 70 hole 43.31: 2(-150,0) 3(-50,0) 4(50,0) 5(150,0) 6(250,0)
  silkscreen extent -300,-50 300,50
JP1 [mil] "JP1"
  rect 70x70 hole 43.31: 1(0,-50)
  round 70 hole 43.31: 2(0,50)
  silkscreen extent -50,-100 50,100
L0805_5MIL_DWS [mil] "L0805_5MIL_DWS"
  rect 50x60 smd: 1(-40,0) 2(40,0)
  silkscreen extent -80,-40 80,40
LED-0603 [mil] "LED-0603"
  rect 40x40 smd: A(35,0) C(-35,0)
  silkscreen extent -70,-30 65,59
LOGO-OPENHARDWARE_8X8 [mil] "LOGO-OPENHARDWARE_8X8"
  silkscreen extent -217,-210 232,155
ML10-MALE [mil] "ML10-MALE"
  rect 66x66 hole 43.31: 1(-200,-50)
  round 66 hole 43.31: 2(-200,50) 3(-100,-50) 4(-100,50) 5(0,-50) 6(0,50) 7(100,-50) 8(100,50) 9(200,-50) 10(200,50)
  silkscreen extent -400,-175 400,185
ML40 [mil] "ML40"
  rect 66x66 hole 40: 1(-950,-50)
  round 66 hole 40: 2(-950,50) 3(-850,-50) 4(-850,50) 5(-750,-50) 6(-750,50) 7(-650,-50) 8(-650,50) 9(-550,-50) 10(-550,50) 11(-450,-50) 12(-450,50) 13(-350,-50) 14(-350,50) 15(-250,-50) 16(-250,50) 17(-150,-50) 18(-150,50) 19(-50,-50) 20(-50,50) 21(50,-50) 22(50,50) 23(150,-50) 24(150,50) 25(250,-50) 26(250,50) 27(350,-50) 28(350,50) 29(450,-50) 30(450,50) 31(550,-50) 32(550,50) 33(650,-50) 34(650,50) 35(750,-50) 36(750,50) 37(850,-50) 38(850,50) 39(950,-50) 40(950,50)
  silkscreen extent -1150,-175 1150,185
MLL-41 [mm] "MLL-41"
  rect 1.45x1.8 smd: A(2.445,0) K(-2.445,0)
  silkscreen extent -0.89,-1.14 0.63,1.14
OLIMEX1_V [mil] "OLIMEX1_V"
  silkscreen extent -692,12 -52,167
PB [mil] "PB"
  silkscreen extent -106,-106 106,106
PJ-W47S-05D2-LF_5PIN_V2 [mm] "PJ-W47S-05D2-LF_5PIN_V2"
  rect 2x3 smd: 1(2.1,-0.5) 2(14.5,-0.5) 3(6.8,6.2) 5(5,-0.5)
  round 1.9 hole 1.9: 1(6,3) 1(13,3)
  rect 3x2 smd: 4(18.5,3.8)
  silkscreen extent 0,0 17.2,6
PW [mm] "PW"
  rect 0.3x1.5 smd: 1(-2.925,-3) 2(-2.275,-3) 3(-1.625,-3) 4(-0.975,-3) 5(-0.325,-3) 6(0.325,-3) 7(0.975,-3) 8(1.625,-3) 9(2.275,-3) 10(2.925,-3) 11(2.925,3) 12(2.275,3) 13(1.625,3) 14(0.975,3) 15(0.325,3) 16(-0.325,3) 17(-0.975,3) 18(-1.625,3) 19(-2.275,3) 20(-2.925,3)
  silkscreen extent -3.25,-1.85 3.25,1.85
PWR_JACK_UNI_MILLING [mm] "PWR_JACK_UNI_MILLING"
  round 1.5 hole 1: +(0,4.75) +1(0,5.25) +2(0,5.75) +3(0,6.25) +4(0,4.25) +5(0,3.75) +6(0,3.25) -(-6.5,4.75) -1(-6.5,5.25) -2(-6.5,5.75) -3(-6.5,4.25) -4(-6.5,3.75) -5(-6.5,6.25) -6(-6.5,3.25) --(-3.3,0.3) --1(-3.8,0.3) --2(-4.3,0.3) --3(-4.8,0.3) --4(-2.8,0.3) --5(-2.3,0.3) --6(-1.8,0.3)
  silkscreen extent -13.5,0.3 0,9.35
R0603_5MIL_DWS [mil] "R0603_5MIL_DWS"
  rect 40x40 smd: 1(-35,0) 2(35,0)
  silkscreen extent -65,-30 65,30
R_MATRIX_4 [mil] "R_MATRIX_4"
  rect 40x30 smd: 1.1(-30,50) 1.2(30,50) 4.1(-30,-50) 4.2(30,-50)
  rect 40x20 smd: 2.1(-30,15) 2.2(30,15) 3.1(-30,-15) 3.2(30,-15)
R_MATRIX_4_0402_25X625 [mil] "R_MATRIX_4_0402_25X625"
  rect 24.61x9.84 smd: 1.1(-20.18,29.53) 1.2(20.18,29.53) 2.1(-20.18,9.84) 2.2(20.18,9.84) 3.1(-20.18,-9.84) 3.2(20.18,-9.84) 4.1(-20.18,-29.53) 4.2(20.18,-29.53)
  silkscreen extent -20,-43 20,43
RECYCLE_BIN1/8 [mil] "RECYCLE_BIN1/8"
  silkscreen extent 0,0 180,240
ROHS [mil] "ROHS"
  silkscreen extent -40,-25 675,330
SJ_1_SMALLER [mil] "SJ_1_SMALLER"
  rect 20x30 smd: 1(-15,0) 2(15,0)
  silkscreen extent -30,-20 30,20
SJ_1_SMALLER_CLOSE [mil] "SJ_1_SMALLER_CLOSE"
  rect 20x30 smd: 1(-15,0) 2(15,0)
  Top lines w10: -15,0 15,0
  silkscreen extent -30,-20 30,20
SOD-123 [mm] "SOD-123"
  rect 1x1.4 smd: A(1.9,0) C(-1.9,0)
  silkscreen extent -0.9,-0.9 0.8,0.9
SOT23 [mm] "SOT23"
  rect 1x1.4 smd: 1(-0.95,-1.1) 2(0.95,-1.1) 3(0,1.1)
  silkscreen extent -1.42,-0.66 1.42,0.66
SOT23-5 [mil] "SOT23-5"
  rect 21.65x47.24 smd: 1(-37.4,-51.19) 2(0,-51.19) 3(37.4,-51.19) 4(37.4,51.19) 5(-37.4,51.19)
  silkscreen extent -56,-32 56,32
SOT23C(BAT54S) [mm] "SOT23C(BAT54S)"
  rect 1x1.4 smd: 1(-0.95,-1.1) 2(0.95,-1.1) 3(0,1.1)
  silkscreen extent -1.42,-0.66 1.42,0.66
SW-TAKT_6X3.5_SMD [mil] "SW-TAKT_6X3.5_SMD"
  rect 50x60 smd: P$1(0,160) P$2(0,-160)
  silkscreen extent -80,-115 80,115
TEST_PAD40/70/SQUARE [mil] "TEST_PAD40/70/SQUARE"
  rect 70x70 hole 40: P$1(0,0)
TESTPAD_40-ROUND [mil] "TESTPAD_40-ROUND"
  rrect100% 40x40 smd: 1(0,0)
TFR-MEM-CON [mm] "TFR-MEM-CON"
  rect 0.8x1.5 smd: 1(-3.2,10.7) 2(-2.1,10.3) 3(-1,10.7) 4(0.1,10.9) 5(1.2,10.7) 6(2.3,10.9) 7(3.4,10.7) 8(4.5,10.7)
  rect 2x2 smd: 9(3.7,0.1) 10(-2,0.1)
  rect 1.4x1.9 smd: 11(5.3,13.55) 12(-7.85,14.55)
  silkscreen extent -8.25,0 5.75,15.2
TQFP176 [mm] "TQFP176"
  rect 0.2x1.3 smd: 1(-8.6,-10.85) 2(-8.2,-10.85) 3(-7.8,-10.85) 4(-7.4,-10.85) 5(-7,-10.85) 6(-6.6,-10.85) 7(-6.2,-10.85) 8(-5.8,-10.85) 9(-5.4,-10.85) 10(-5,-10.85) 11(-4.6,-10.85) 12(-4.2,-10.85) 13(-3.8,-10.85) 14(-3.4,-10.85) 15(-3,-10.85) 16(-2.6,-10.85) 17(-2.2,-10.85) 18(-1.8,-10.85) 19(-1.4,-10.85) 20(-1,-10.85) 21(-0.6,-10.85) 22(-0.2,-10.85) 23(0.2,-10.85) 24(0.6,-10.85) 25(1,-10.85) 26(1.4,-10.85) 27(1.8,-10.85) 28(2.2,-10.85) 29(2.6,-10.85) 30(3,-10.85) 31(3.4,-10.85) 32(3.8,-10.85) 33(4.2,-10.85) 34(4.6,-10.85) 35(5,-10.85) 36(5.4,-10.85) 37(5.8,-10.85) 38(6.2,-10.85) 39(6.6,-10.85) 40(7,-10.85) 41(7.4,-10.85) 42(7.8,-10.85) 43(8.2,-10.85) 44(8.6,-10.85) 89(8.6,10.85) 90(8.2,10.85) 91(7.8,10.85) 92(7.4,10.85) 93(7,10.85) 94(6.6,10.85) 95(6.2,10.85) 96(5.8,10.85) 97(5.4,10.85) 98(5,10.85) 99(4.6,10.85) 100(4.2,10.85) 101(3.8,10.85) 102(3.4,10.85) 103(3,10.85) 104(2.6,10.85) 105(2.2,10.85) 106(1.8,10.85) 107(1.4,10.85) 108(1,10.85) 109(0.6,10.85) 110(0.2,10.85) 111(-0.2,10.85) 112(-0.6,10.85) 113(-1,10.85) 114(-1.4,10.85) 115(-1.8,10.85) 116(-2.2,10.85) 117(-2.6,10.85) 118(-3,10.85) 119(-3.4,10.85) 120(-3.8,10.85) 121(-4.2,10.85) 122(-4.6,10.85) 123(-5,10.85) 124(-5.4,10.85) 125(-5.8,10.85) 126(-6.2,10.85) 127(-6.6,10.85) 128(-7,10.85) 129(-7.4,10.85) 130(-7.8,10.85) 131(-8.2,10.85) 132(-8.6,10.85)
  rect 1.3x0.2 smd: 45(10.85,-8.6) 46(10.85,-8.2) 47(10.85,-7.8) 48(10.85,-7.4) 49(10.85,-7) 50(10.85,-6.6) 51(10.85,-6.2) 52(10.85,-5.8) 53(10.85,-5.4) 54(10.85,-5) 55(10.85,-4.6) 56(10.85,-4.2) 57(10.85,-3.8) 58(10.85,-3.4) 59(10.85,-3) 60(10.85,-2.6) 61(10.85,-2.2) 62(10.85,-1.8) 63(10.85,-1.4) 64(10.85,-1) 65(10.85,-0.6) 66(10.85,-0.2) 67(10.85,0.2) 68(10.85,0.6) 69(10.85,1) 70(10.85,1.4) 71(10.85,1.8) 72(10.85,2.2) 73(10.85,2.6) 74(10.85,3) 75(10.85,3.4) 76(10.85,3.8) 77(10.85,4.2) 78(10.85,4.6) 79(10.85,5) 80(10.85,5.4) 81(10.85,5.8) 82(10.85,6.2) 83(10.85,6.6) 84(10.85,7) 85(10.85,7.4) 86(10.85,7.8) 87(10.85,8.2) 88(10.85,8.6) 133(-10.85,8.6) 134(-10.85,8.2) 135(-10.85,7.8) 136(-10.85,7.4) 137(-10.85,7) 138(-10.85,6.6) 139(-10.85,6.2) 140(-10.85,5.8) 141(-10.85,5.4) 142(-10.85,5) 143(-10.85,4.6) 144(-10.85,4.2) 145(-10.85,3.8) 146(-10.85,3.4) 147(-10.85,3) 148(-10.85,2.6) 149(-10.85,2.2) 150(-10.85,1.8) 151(-10.85,1.4) 152(-10.85,1) 153(-10.85,0.6) 154(-10.85,0.2) 155(-10.85,-0.2) 156(-10.85,-0.6) 157(-10.85,-1) 158(-10.85,-1.4) 159(-10.85,-1.8) 160(-10.85,-2.2) 161(-10.85,-2.6) 162(-10.85,-3) 163(-10.85,-3.4) 164(-10.85,-3.8) 165(-10.85,-4.2) 166(-10.85,-4.6) 167(-10.85,-5) 168(-10.85,-5.4) 169(-10.85,-5.8) 170(-10.85,-6.2) 171(-10.85,-6.6) 172(-10.85,-7) 173(-10.85,-7.4) 174(-10.85,-7.8) 175(-10.85,-8.2) 176(-10.85,-8.6)
  rect 6x6 smd: GND_PAD(0,0)
  rect 2.184x2.184 hole 1.8: P$2(0,0)
  rect 0.406x0.406 hole 0.3: P$3(-2.6,-1) P$4(-1.8,-1) P$5(-1,-2.6) P$6(-1,-1.8) P$7(1,-2.6) P$8(1,-1.8) P$9(2.6,-1) P$10(1.8,-1) P$11(-2.6,1) P$12(-1.8,1) P$13(2.6,1) P$14(1.8,1) P$15(-1,2.6) P$16(-1,1.8) P$17(1,2.6) P$18(1,1.8)
  silkscreen extent -9.97,-9.97 9.97,9.97
USB_MINI_9PIN [mm] "USB_MINI_9PIN"
  round 1 hole 1: 1(0,-2.2) 1(0,2.2)
  rect 2.25x0.5 smd: D+(2.706,0) D-(2.706,0.8) GND(2.706,-1.6) ID(2.706,-0.8) VBUS(2.706,1.6)
  rect 4x2.1 smd: GND1(-1.9,4.95) GND3(-1.9,-4.95)
  rect 3.5x2.1 smd: GND2(2.35,4.95) GND4(2.35,-4.95)
  Top keep-out region: -3.9,-3.1 -2.7,-3.1 -2.7,3.1 -3.9,3.1
  silkscreen extent -5.9,-3.9 0,3.9
USB_PN87520_HOST_PTH [mm] "USB_PN87520_HOST_PTH"
  oval 1.5x3 hole 1: 1(-3.5,2.71) 2(-1,2.71) 3(1,2.71) 4(3.5,2.71)
  round 3.3 hole 2.2: P$1(6.07,0) P$2(-6.07,0)
  silkscreen extent -6,-10.19 6,4.11

## Part data
1.2V_E 1.5V_E 3.3V_E 5V_E: library part SJ_1_SMALLER_CLOSE
C1 C2 C3 C4 C5 C6 C7 C8 C9 C10 C11 C12 C13 C14 C15 C16 C17 C18 C19 C20 C21 C22 C23 C24 C25 C26 C27 C28 C29 C30 C31 C32 C33 C34 C35 C36 C37 C38 C39 C40 C41 C42 C43 C44 C45 C46 C47 C48 C49 C50 C51 C52 C55 C56 C57 C58 C59 C60 C61 C62 C63 C64 C65 C66 C67 C68 C69 C70 C71 C72 C73 C74 C75 C76 C77 C78 C79 C80 C81 C82 C83 C84 C85 C86 C87 C88 C89 C90 C91 C92 C93 C94 C95 C97 C98 C100 C103 C104: library part C0603_DWS
C53 C101: library part E2,5-6,3
C54 C102: library part E3,5-8
D1: library part SOD-123
D2 D3 D4 D5 D6: library part SOT23C(BAT54S)
D7: library part MLL-41
D8: library part DO214AA
FET1 FET2 FET3 FET4 U13: library part SOT23
GND_PIN: library part TEST_PAD40/70/SQUARE
GPIO-1 UEXT: library part ML10-MALE
GPIO-2 LCD_CON: library part ML40
HEADPHONES: library part PJ-W47S-05D2-LF_5PIN_V2
HOST_EN: library part SJ_1_SMALLER
JTAG: library part HN1X6
L1 L6 L7 L8 L9: library part L0805_5MIL_DWS
L2 L3 L4 L5: library part CD32
LED1 PWR_LED: library part LED-0603
MIC: library part JP1
P0 P1 P2 P3 P4 P5 P6 P7: library part TESTPAD_40-ROUND
PWR: library part PWR_JACK_UNI_MILLING
Q1: library part HC49/SMD2_THIN
R1: library part 0603_0R
R2 R3 R4 R5 R6 R7 R8 R9 R10 R11 R12 R13 R14 R15 R16 R17 R18 R19 R20 R21 R22 R23 R24 R25 R26 R27 R28 R29 R30 R31 R32 R33 R34 R35 R36 R37 R38 R39 R40 R41 R42 R43 R44 R45 R46 R47 R48 R49 R50 R51 R52 R53 R54 R55 R56 R57 R58 R59 R60 R61 R62 R63 R64 R65 R66 R67 R68 R69 R70 R71 R72 R73: library part R0603_5MIL_DWS
RESET UBOOT: library part SW-TAKT_6X3.5_SMD
RM1 RM2 RM3 RM4 RM5 RM6 RM7 RM8 RM9 RM10 RM16: library part R_MATRIX_4_0402_25X625
RM12: library part R_MATRIX_4
SD: library part TFR-MEM-CON
U1: library part TQFP176
U2: library part FBGA96
U3 U7 U8 U9 U12: library part SOT23-5
U4 U5 U6: library part PW
U$1 U$2 U$3: library part FIDUCIAL-1X2
U$4 U$8: library part OLIMEX1_V
U$5: library part LOGO-OPENHARDWARE_8X8
U$9: library part PB
U$10: library part ESD_SYMBOL
U$11: library part RECYCLE_BIN1/8
U$12: library part ROHS
UART0: library part HN1X4
USB_HOST: library part USB_PN87520_HOST_PTH
USB_OTG: library part USB_MINI_9PIN
VGA_DB15-F: library part DB15-F_22MM

## Via types
v1: diameter 23.75/23.75/23.75/23.75 (per signal layer), hole 15.75, Top to Bottom, 263 vias
v2: diameter 35.43/31.62/31.62/35.43 (per signal layer), hole 23.62, Top to Bottom, 120 vias
v3: diameter 19.81/19.81/19.81/19.81 (per signal layer), hole 11.81, Top to Bottom, 48 vias
v4: diameter 18/18/18/18 (per signal layer), hole 10, Top to Bottom, 41 vias
v5: diameter 169.92/137.92/137.92/169.92 (per signal layer), hole 129.92, Top to Bottom, 4 vias

## Nets (pads, with @x,y where several pads share a name; then routed paths per layer and width w, separated by ;. In a path a pad name is that pad's centre, name@x,y a point inside that pad or via, vN(x,y) a via of type N, cw(c..) or ccw(c..) an arc to the next point about the centre after c; other vN are vias at no path point)
+5V: 5V_E.2 C57.1 C74.1 C80.1 C88.1 C90.1 C97.1 C98.1 D5.2 D6.2 FET3.2 GPIO-1.1 GPIO-2.1 LCD_CON.1 P1.1 R39.2 R40.2 R43.2 R54.1 U3.1 U3.4 U7.1 U7.4 U8.1 U8.4 U9.5 U12.5 | length 14952.3
  Top w20: 5V_E.2@1320,2135 5V_E.2@1325,2135 ; U7.4@1373.81,1712.4 U7.4@1384.6,1712.4 ; C80.1@1390,1775 1384.6,1769.6 U7.4@1384.6,1712.4 ; U7.1@1476.19,1637.6 1442.4,1637.6 1387,1693 1387,1710 U7.4@1384.6,1712.4 ; C74.1@1545,1840 1542.6,1842.4 U3.4@1542.6,1903.81 1542.6,1915 1560,1915 1617.4,1972.4 U3.1@1617.4,2006.19 ; C88.1@1855,1495 1852.6,1497.4 U8.4@1852.6,1563.81 1852.6,1577 1877,1577 1927.4,1627.4 U8.1@1927.4,1666.19
  Top w22: U12.5@1762.6,2766.19 1765,2768.59 C90.1@1765,2835 ; C98.1@1800,3280 1800,3217.4 U9.5@1801.19,3217.4
  Top w24: D6.2@4316.69,3246.6 4335.29,3228 v2(4364,3228) 4364,3191 R39.2@4345,3172 ; D5.2@4316.69,3406.6 4335.29,3388 v2(4364,3388) ; R40.2@4345,2948 4364,2967 v2(4364,2986)
  Top w30: 5V_E.2@1325,2135 v2(1349,2135)
  Top w32: v2(1390,1815) 1435,1860 1545,1860 C74.1@1545,1840
  Top w40: v2(1349,2103) v2(1349,2135) v2(1349,2167) ; C57.1@1383,1065 R43.2@1383,1125 1383,1189.29 FET3.2@1385.4,1191.69 1393.71,1200 v2(1476,1200) ; C80.1@1390,1775 v2(1390,1815) ; v2(1444,2856) 1765,2856 ; v2(1672,1396) 1812,1396 1855,1439 C88.1@1855,1495 ; C90.1@1765,2835 1765,2856 ; C97.1@1765,2895 1765,2856 ; C98.1@1800,3280 v2(1800,3320) ; R54.1@4639,1128 v2(4680,1128)
  Bottom w10: v2(1672,1396) 1776,1500 P1.1@1850,1500
  Bottom w24: 4358,3312 4364,3312 ; v2(4364,2986) v2(4364,3228) 4364,3312 ; v2(4364,3388) 4364,3312
  Bottom w36: 1244,3475 1242,3477 1242,3938 1527,4223 ; LCD_CON.1@1625,4125 1527,4223 ; 4358,3312 4284,3312 4224,3372 4224,3828 4396,4000 4396,4244 4352,4288 1592,4288 1527,4223
  Bottom w40: v2(1444,2856) 1384,2796 1244,2796 ; v2(1672,1396) 1476,1396 ; v2(1800,3320) 1570,3320 1415,3475 1244,3475 1244,2796 ; GPIO-2.1@3525,1225 3588,1162 3588,1060 ; GPIO-1.1@4325,1225 4388,1162 4388,1128 ; v2(4680,1128) 4388,1128 ; 1244,2796 1244,2271 1349,2166 v2(1349,2135) v2(1349,2103) 1349,1856 v2(1390,1815) 1476,1729 1476,1396 ; 1476,1396 v2(1476,1200) 1476,1184 1600,1060 3588,1060 ; 3588,1060 4356,1060 4388,1092 4388,1128
+5V_OTG_PWR: C100.1 FET3.3 L7.1 P2.1 USB_OTG.VBUS | length 2028.9
  Top w20: USB_OTG.VBUS@1281.54,2602.99 1390,2602.99 ; L7.1@1390,2640 1390,2602.99 ; v2(1400,2510) 1400,2602.99 1390,2602.99
  Top w40: FET3.3@1348,1278.31 1348,1301.69 1490.31,1444 v2(1528,1444) ; C100.1@1385,2715 1385,2645 L7.1@1390,2640
  Bottom w10: 1528,1600 P2.1@1850,1600
  Bottom w36: v2(1400,2510) 1400,1946 1528,1818 1528,1600 v2(1528,1444)
A0: RM5.1.2 U2.N3 | length 983.8
  Top w6: U2.N3@3490.56,1816.03 3490.56,1828.84 3529.02,1867.3 3619.3,1867.3 3775,2023 3775,2326 3745,2356 3745,2434 3775,2464 3775,2599.35 RM5.1.2@3771.53,2602.82
A1: RM6.3.2 U2.P7 | length 538.8
  Top w5: 3537.8,1957.76 3537.8,1980.99 ; 3546.07,1989.26 3561.03,1989.26 ; 3569.3,1997.53 3569.3,2013.28
  Top w6: U2.P7@3522.06,1942.01 3537.8,1957.76 ; 3537.8,1980.99 3546.07,1989.26 ; 3561.03,1989.26 3569.3,1997.53 ; 3569.3,2013.28 3585.02,2029 3614,2029 3667,2082 3667,2281 3637,2311 3637,2341 3618.16,2359.84 RM6.3.2@3618.16,2374.82
A2: RM8.3.2 U2.P3 | length 733.9
  Top w6: U2.P3@3522.06,1816.03 3522.06,1825.84 3540.11,1843.9 3629.9,1843.9 3799,2013 3799,2341.31 3780.16,2360.16 RM8.3.2@3780.16,2374.82
A3: RM8.4.2 U2.N2 | length 776.8
  Top w5: 3506.31,1808.16 3506.31,1824.91
  Top w6: U2.N2@3490.56,1784.53 3506.31,1800.28 3506.31,1808.16 ; 3506.31,1824.91 3506.31,1827.34 3534.56,1855.6 3624.6,1855.6 3787,2018 3787,2333.94 3760.47,2360.47 RM8.4.2@3760.47,2374.82
A4: RM6.4.2 U2.P8 | length 516.9
  Top w5: 3537.8,1997.53 3537.8,2013.87 ; 3541.67,2017.73 3541.67,2036.98
  Top w6: U2.P8@3522.06,1973.51 3522.06,1981.78 3537.8,1997.53 ; 3537.8,2013.87 3541.67,2017.73 ; 3541.67,2036.98 3551.68,2047 3615,2047 3655,2087 3655,2276 3625,2306 3625,2334 3598.47,2360.53 RM6.4.2@3598.47,2374.82
A5: RM8.2.2 U2.P2 | length 767
  Top w5: 3537.8,1800.28 3537.8,1824.34
  Top w6: U2.P2@3522.06,1784.53 3537.8,1800.28 ; 3537.8,1824.34 3545.66,1832.2 3635.2,1832.2 3811,2008 3811,2348.69 3799.84,2359.84 RM8.2.2@3799.84,2374.82
A6: RM6.2.2 U2.R8 | length 491.4
  Top w5: 3577.57,1989.26 3592.3,1989.26
  Top w6: U2.R8@3553.55,1973.51 3561.82,1973.51 3577.57,1989.26 ; 3592.3,1989.26 3605.26,1989.26 3679,2063 3679,2286 3649,2316 3649,2347 3637.84,2358.16 RM6.2.2@3637.84,2374.82
A7: RM10.2.2 U2.R2 | length 1145.2
  Top w5: 3569.3,1768.79 3592.92,1768.79 ; 3596.86,1768.79 3612.23,1768.79
  Top w6: U2.R2@3553.55,1784.53 3569.3,1768.79 ; 3592.92,1768.79 3596.86,1768.79 ; 3612.23,1768.79 3639.79,1768.79 3859,1988 3859,2700 3847.84,2711.16 RM10.2.2@3847.84,2725.82
A8: RM6.1.2 U2.T8 | length 471.6
  Top w6: U2.T8@3585.05,1973.51 3606.51,1973.51 3691,2058 3691,2291 3661,2321 3661,2359 3657.53,2362.47 RM6.1.2@3657.53,2374.82
A9: RM10.4.2 U2.R3 | length 1108.7
  Top w5: 3577.17,1800.28 3593.98,1800.28
  Top w6: U2.R3@3553.55,1816.03 3569.3,1800.28 3577.17,1800.28 ; 3593.98,1800.28 3637.28,1800.28 3835,1998 3835,2685 3808.47,2711.53 RM10.4.2@3808.47,2725.82
A10: RM7.3.2 U2.L7 | length 728.7
  Top w5: 3443.32,1957.76 3443.32,1981.39 ; 3443.32,1997.13 3443.32,2013.28
  Top w6: U2.L7@3427.57,1942.01 3443.32,1957.76 ; 3443.32,1981.39 3443.32,1997.13 ; 3443.32,2013.28 3435,2021.59 3435,2036.2 3448.8,2050 3468,2050 3477,2059 3494,2059 3506,2071 3524.5,2071 3536.5,2083 3600,2083 3619,2102 3619,2260 3589,2290 3589,2316 3559,2346 3559,2473 3555.16,2476.84 RM7.3.2@3555.16,2488.82
A11: RM9.4.2 U2.R7 | length 666.3
  Top w5: 3569.3,1957.76 3607.76,1957.76
  Top w6: U2.R7@3553.55,1942.01 3569.3,1957.76 ; 3607.76,1957.76 3703,2053 3703,2296 3673,2326 3673,2434 3658,2449 3658,2500.35 RM9.4.2@3661.47,2503.82
A12: RM7.1.2 U2.N7 | length 687.6
  Top w5: 3506.31,1957.76 3506.31,1981.39 ; 3506.31,1997.13 3506.31,2012.88 ; 3506.31,2021.74 3506.31,2037.31
  Top w6: U2.N7@3490.56,1942.01 3506.31,1957.76 ; 3506.31,1981.39 3506.31,1997.13 ; 3506.31,2012.88 3506.31,2021.74 ; 3506.31,2037.31 3516,2047 3534.5,2047 3546.5,2059 3610,2059 3643,2092 3643,2271 3613,2301 3613,2326 3583,2356 3583,2463 3594.53,2474.53 RM7.1.2@3594.53,2488.82
A13: RM8.1.2 U2.T3 | length 688.7
  Top w6: U2.T3@3585.05,1816.03 3636.03,1816.03 3823,2003 3823,2371.35 RM8.1.2@3819.53,2374.82
BA0: RM5.2.2 U2.M2 | length 1026.7
  Top w5: 3474.81,1808.16 3474.81,1824.97
  Top w6: U2.M2@3459.07,1784.53 3474.81,1800.28 3474.81,1808.16 ; 3474.81,1824.97 3474.81,1830.34 3523.47,1879 3614,1879 3763,2028 3763,2321 3733,2351 3733,2439 3763,2469 3763,2573 3751.84,2584.16 RM5.2.2@3751.84,2602.82
BA1: RM7.2.2 U2.N8 | length 673.8
  Top w5: 3474.81,1997.13 3474.81,2013.87
  Top w6: 3474.81,1997.13 3474.81,1989.26 U2.N8@3490.56,1973.51 ; 3474.81,2013.87 3471.19,2017.49 3471.19,2035.93 3482.26,2047 3499,2047 3511,2059 3529.5,2059 3541.5,2071 3605,2071 3631,2097 3631,2266 3601,2296 3601,2321 3571,2351 3571,2473 3574.84,2476.84 RM7.2.2@3574.84,2488.82
BA2: RM5.3.2 U2.M3 | length 993.8
  Top w6: U2.M3@3459.07,1816.03 3459.06,1832.34 3517.42,1890.7 3608.7,1890.7 3751,2033 3751,2316 3721,2346 3721,2444 3751,2474 3751,2565 3732.16,2583.84 RM5.3.2@3732.16,2602.82
CASN: RM9.1.2 U2.K3 | length 907.9
  Top w6: U2.K3@3396.07,1816.03 3414.04,1834 3426.5,1834 3506.6,1914.1 3598.1,1914.1 3727,2043 3727,2306 3697,2336 3697,2454 3720.53,2477.53 RM9.1.2@3720.53,2503.82
CKE: RM7.4.2 U2.K9 | length 739.7
  Top w6: U2.K9@3396.07,2005 3396.07,2014.37 3443.7,2062 3463,2062 3472,2071 3472,2081.5 ; 3484,2080.5 3484,2081.5 ; 3496,2080.5 3496,2089 ; 3505,2416 3541,2416 ; 3505,2428 3541,2428 ; 3505,2440 3541,2440 ; 3505,2452 3543.57,2452 3546.6,2455.03 3546.6,2461 3543.6,2464 3535,2464 3532,2467 3532,2480 3535.47,2483.47 RM7.4.2@3535.47,2488.82 ; 3526,2095 3595,2095 3607,2107 3607,2254 3577,2284 3577,2311 3547,2341 3547,2410
CLK: C55.1 R71.1 U2.J7 | length 1266.1
  Top w4.5: U2.J7@3364.58,1942.01 3364.57,1948.71 3348.83,1964.46 3348.83,2012.83 3374,2038 3385.3,2038 3472.3,2125 3568,2125 3571,2128 3571,2137 3568,2140 3502,2140 3493,2149 3493,2170 3502,2179 3568,2179 3571,2182 3571,2191 3568,2194 3502,2194 3493,2203 3493,2224 3502,2233 3568,2233 3571,2236 3571,2245 3568,2248 3508,2248 3499,2257 3499,2278 3508,2287 3538,2287 3541,2290 3541,2299 3538,2302 3508,2302 3499,2311 3499,2347 3512.5,2360.5 3512.5,2382.5 3509,2386 3478,2386 3469,2395 3425,2395 3415,2405 3415,2439 ; C55.1@3386,2439 3415,2439 ; R71.1@3388,2498 3415,2471 3415,2439
CLKN: C55.2 R70.1 U2.K7 | length 1266.1
  Top w4.5: U2.K7@3396.07,1942.01 3396.07,1950.28 3380.32,1966.03 3380.32,1980.57 3376,1984.9 3376,1993.6 3380.32,1997.93 3380.32,2012.28 3376,2016.61 3376,2023 3379,2026 3390.7,2026 3477.7,2113 3574,2113 3583,2122 3583,2143 3574,2152 3508,2152 3505,2155 3505,2164 3508,2167 3574,2167 3583,2176 3583,2197 3574,2206 3508,2206 3505,2209 3505,2218 3508,2221 3574,2221 3583,2230 3583,2251 3574,2260 3514,2260 3511,2263 3511,2272 3514,2275 3544,2275 3553,2284 3553,2305 3544,2314 3514,2314 3511,2317 3511,2341 3524.5,2354.5 3524.5,2388.5 3515,2398 3484,2398 3475,2407 3430.5,2407 3427,2410.5 3427,2439 ; R70.1@3454,2498 3427,2471 3427,2439 ; C55.2@3456,2439 3427,2439
D0: RM1.1.2 U2.E3 | length 446.1
  Top w5: 3222.34,1742.04 3222.34,1742.34 3222.84,1742.84 3222.84,1760.91 ; 3222.84,1776.66 3222.84,1793.28
  Top w6: RM1.1.2@2934.18,1803.53 2948.47,1803.53 2981,1771 2992,1771 ; 3004,1759 3007,1759 ; 3019,1771 3022,1771 ; 3028,1717 3028,1765 ; 3034,1711 3037,1711 ; 3043,1717 3043,1748 ; 3049,1754 3052,1754 ; 3058,1717 3058,1748 ; 3064,1711 3191.3,1711 3222.34,1742.04 ; 3222.84,1760.91 3222.84,1776.66 ; 3222.84,1793.28 3222.84,1801.84 3237.03,1816.03 U2.E3@3238.59,1816.03